# Altium PCB DB_2.PcbDoc (part 1 of 2)
Units mil, origin at the board's own origin, x right, y up, seen from the top; angles counter-clockwise.
Board outline 1675 x 1950 mil, 4 copper layers (Top Layer, Signal Layer 1, Ground, Bottom Layer), stack 30.634 mil thick; 76 components, 70 nets, 293 pads, 58 vias.
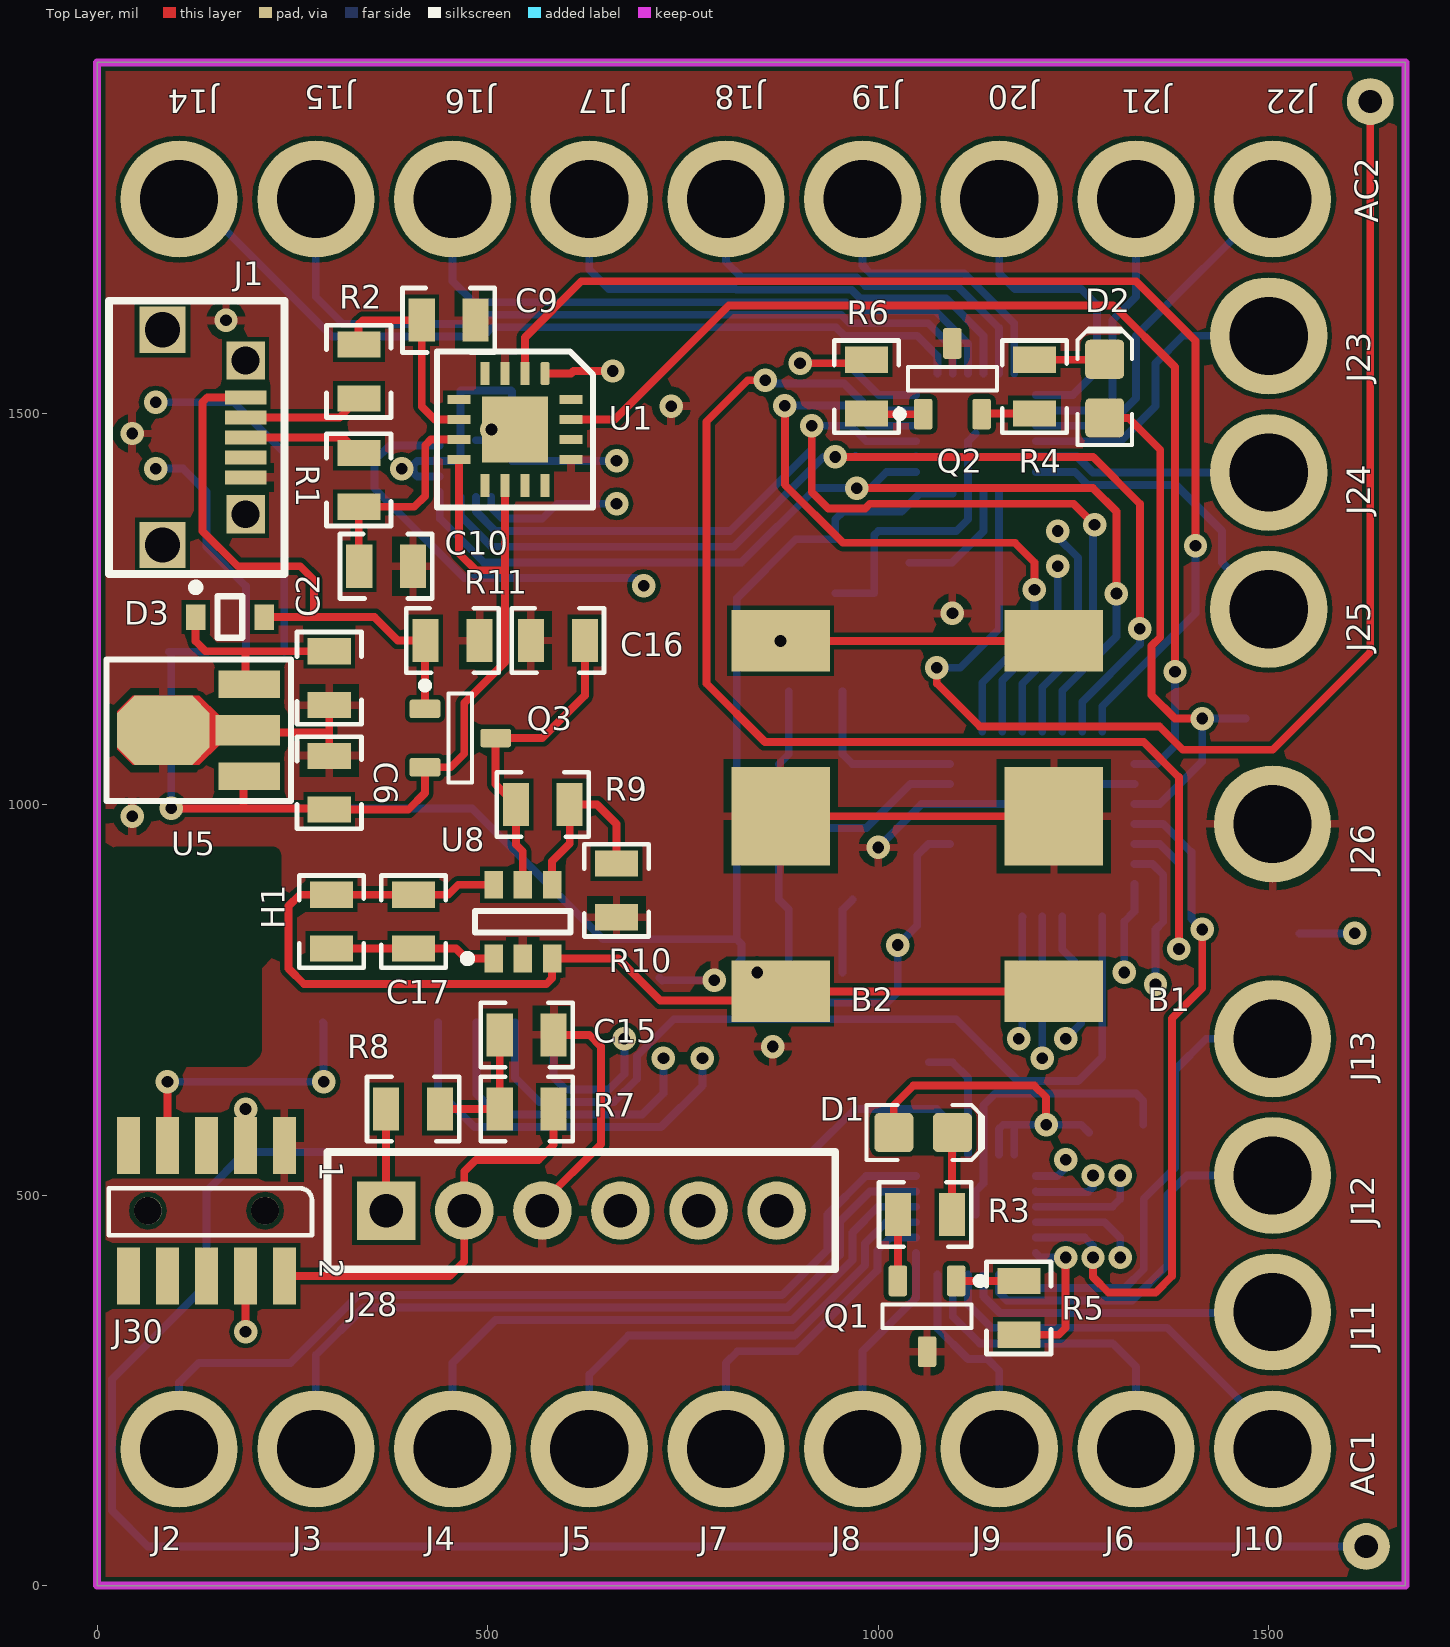
[diagram p0: Top Layer view]
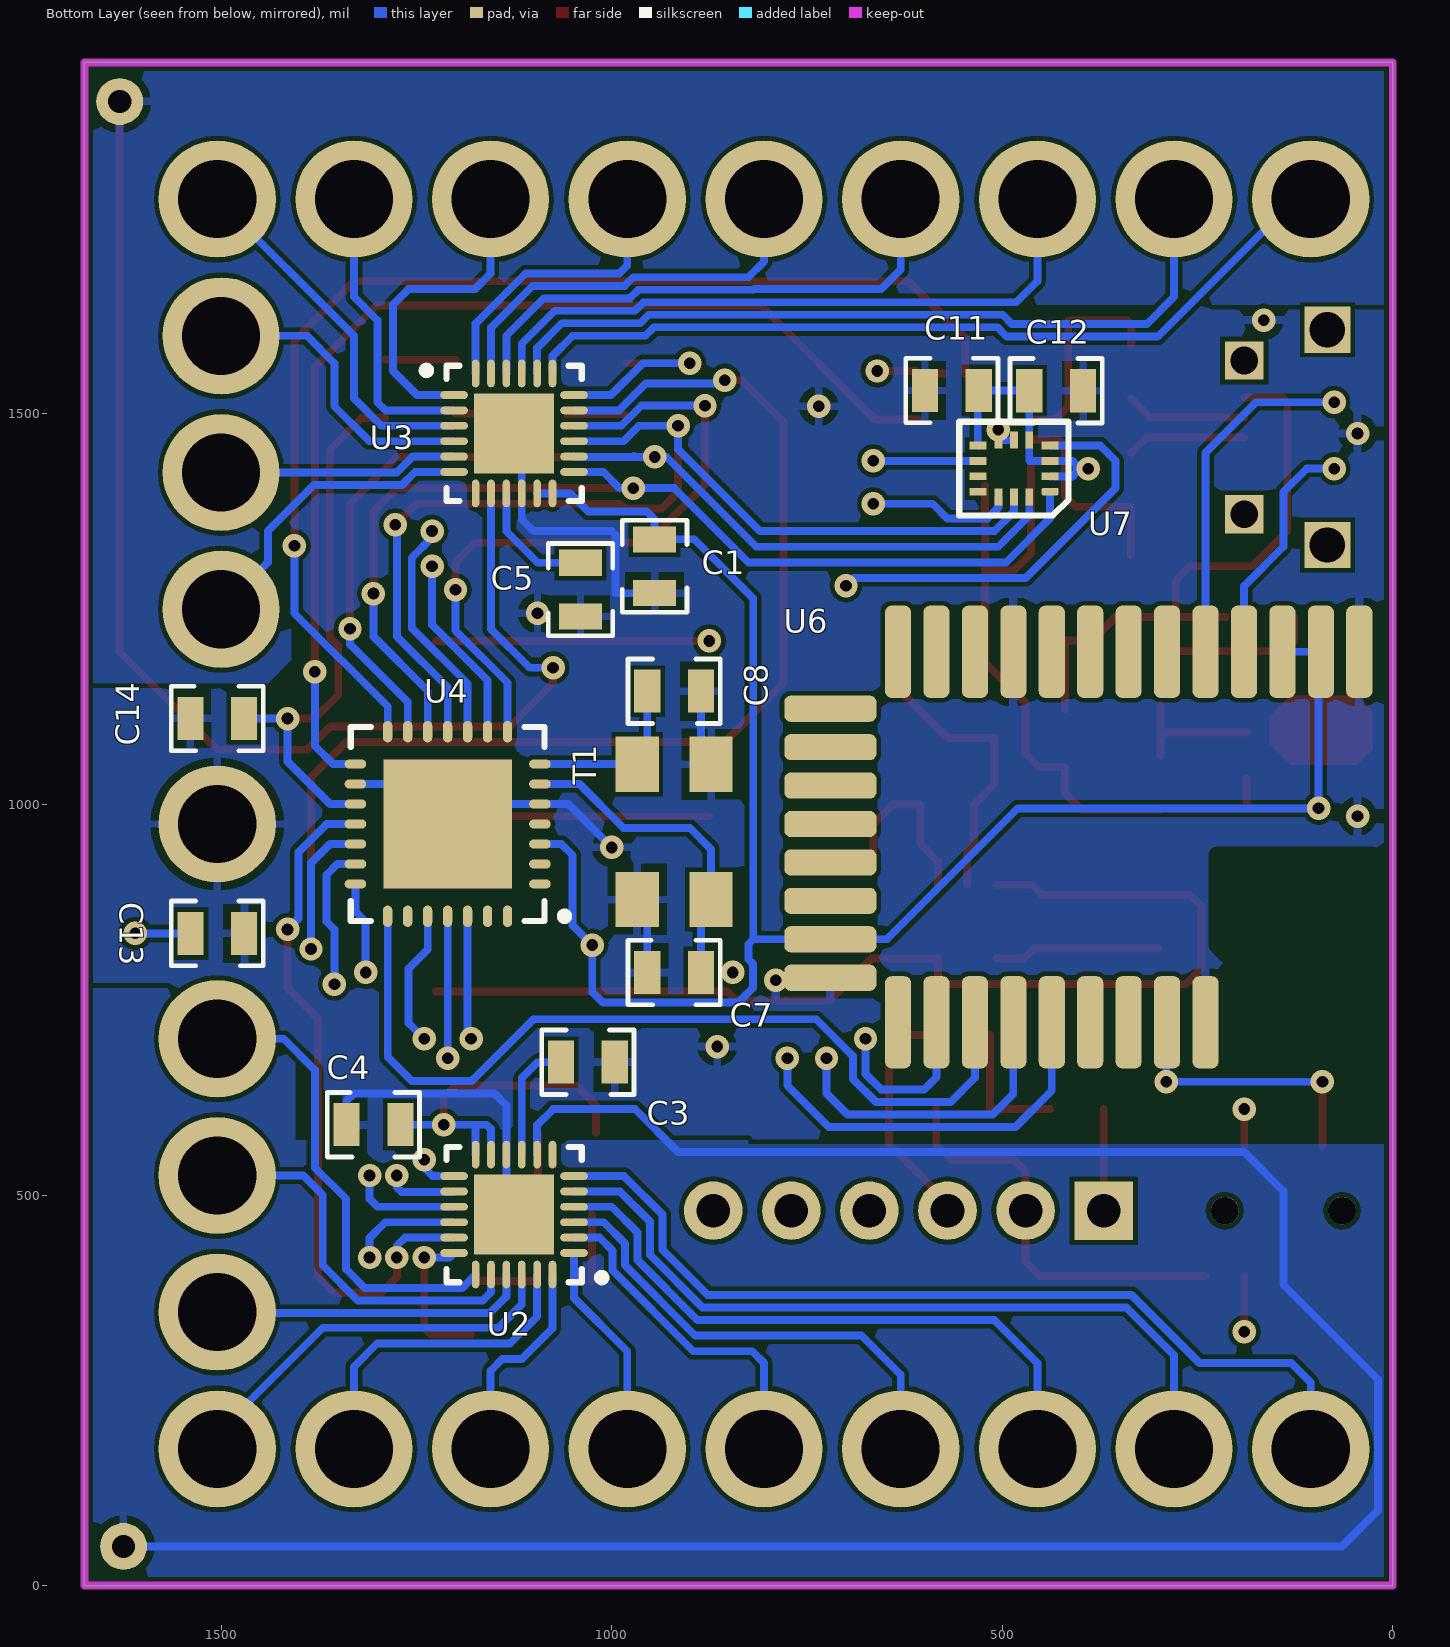
[diagram p1: Bottom Layer view, seen from below]
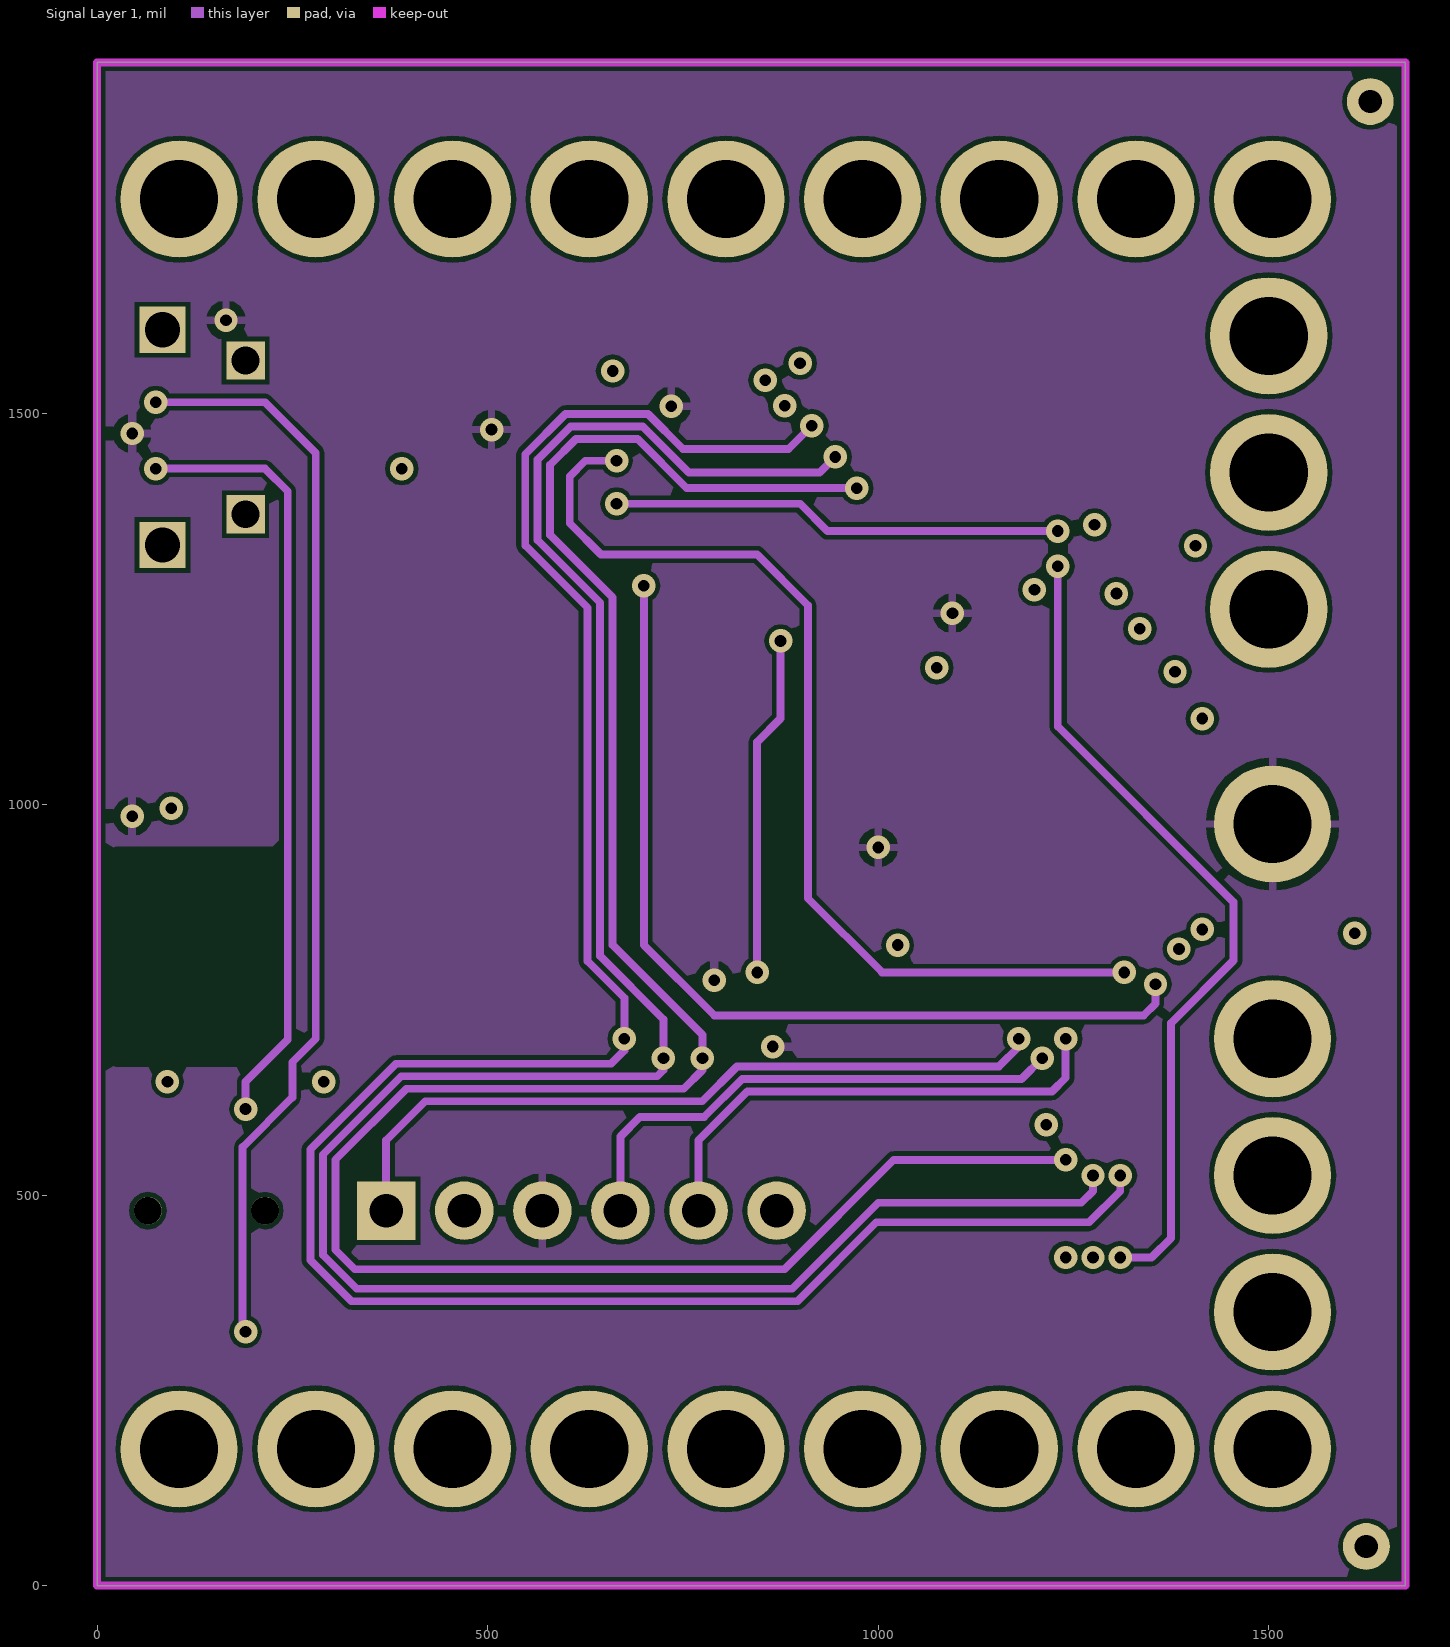
[diagram p2: Signal Layer 1]
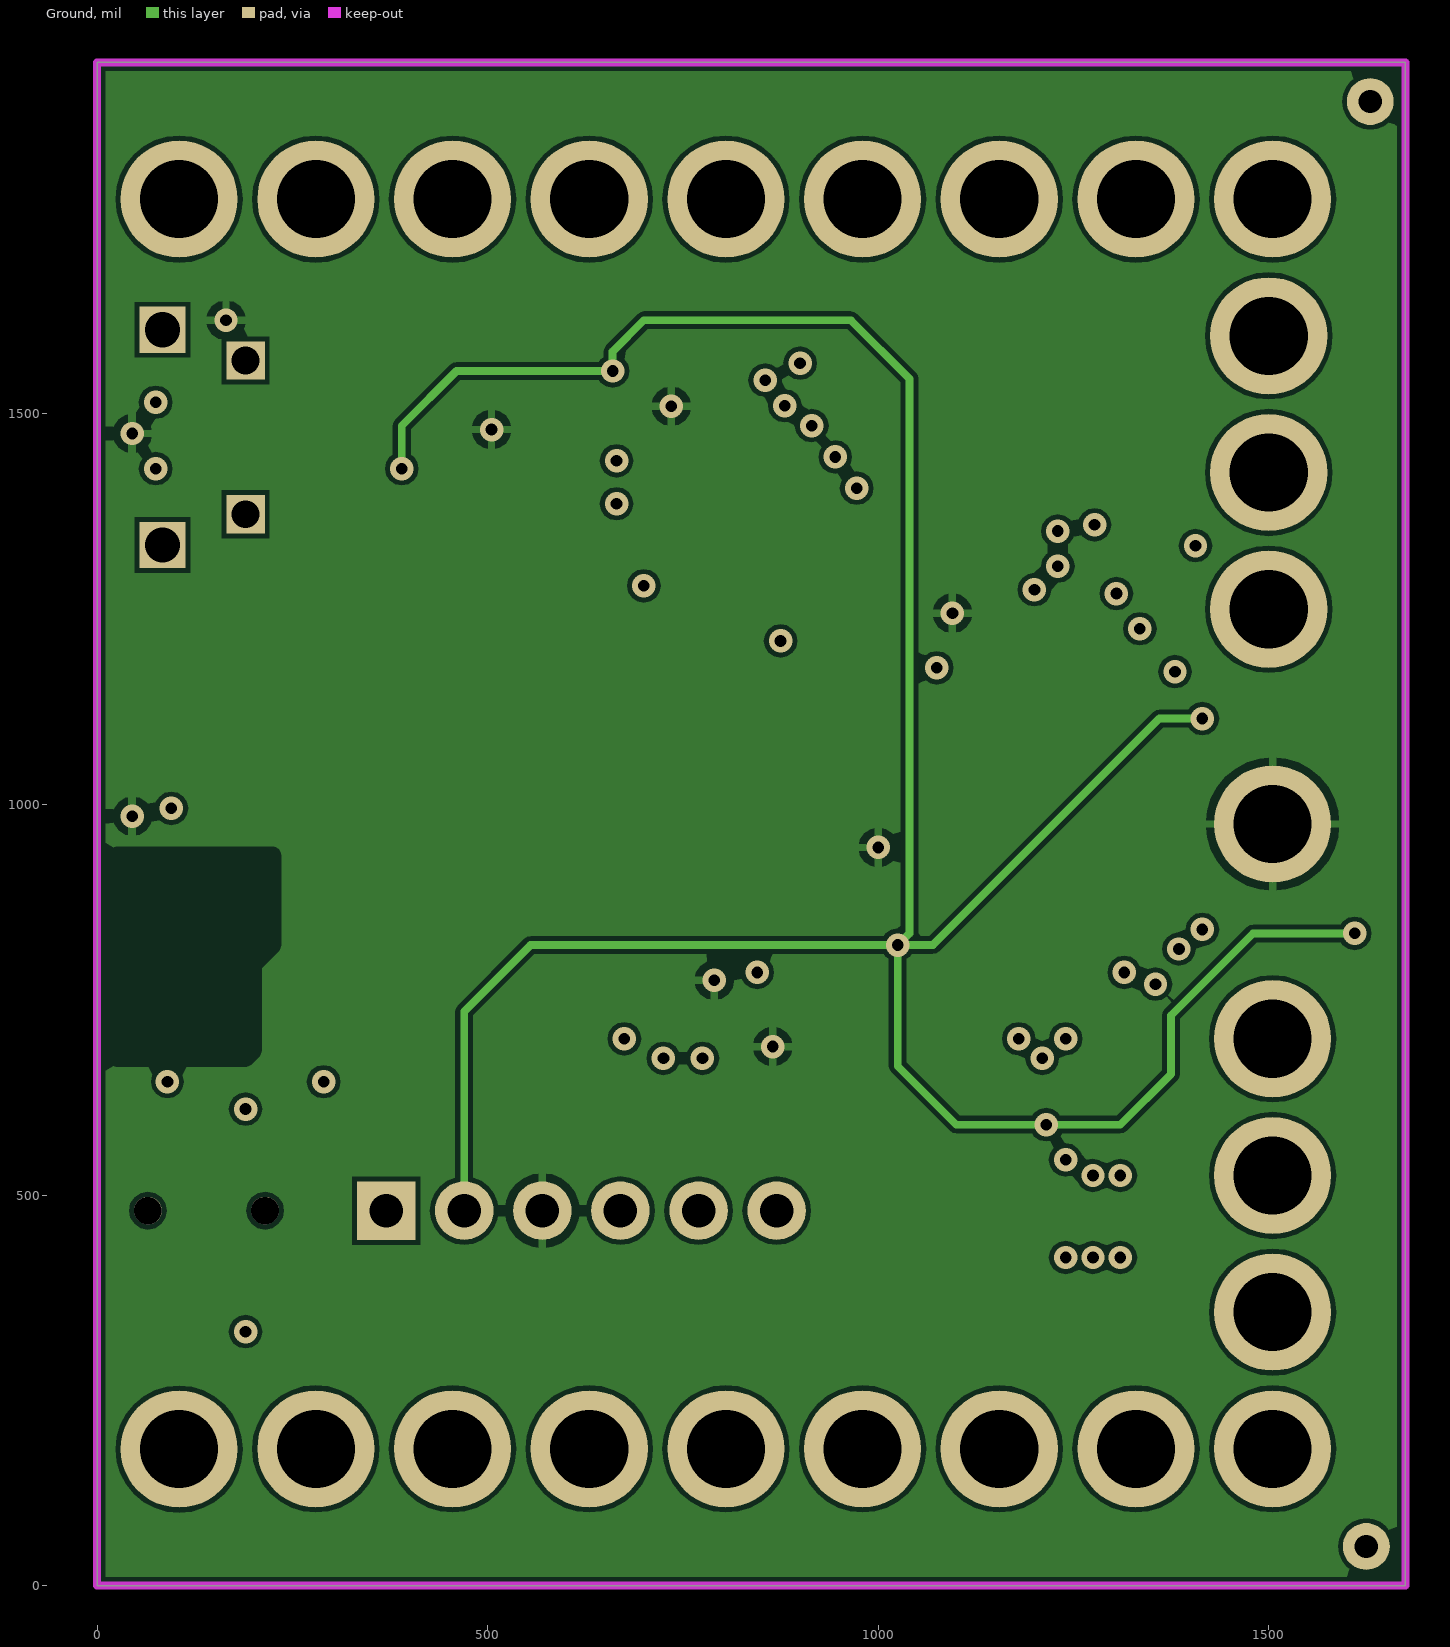
[diagram p3: Ground]
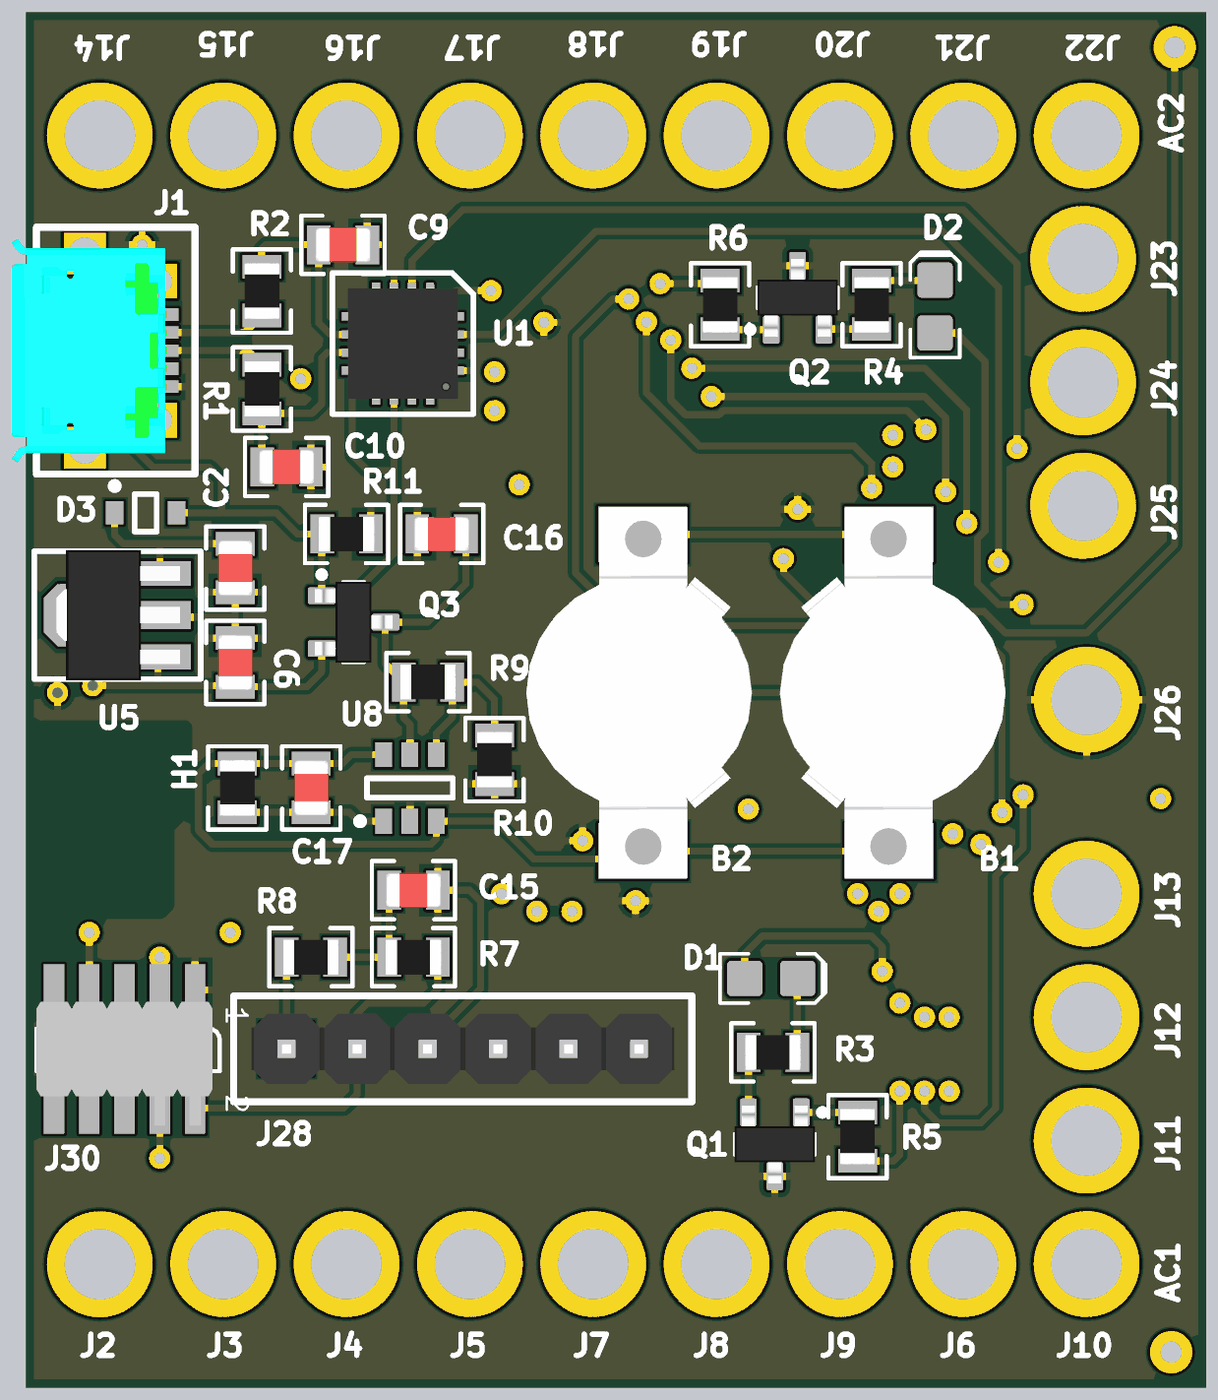
[diagram p4: 3D render of the assembled board from above, using the file's embedded part models]
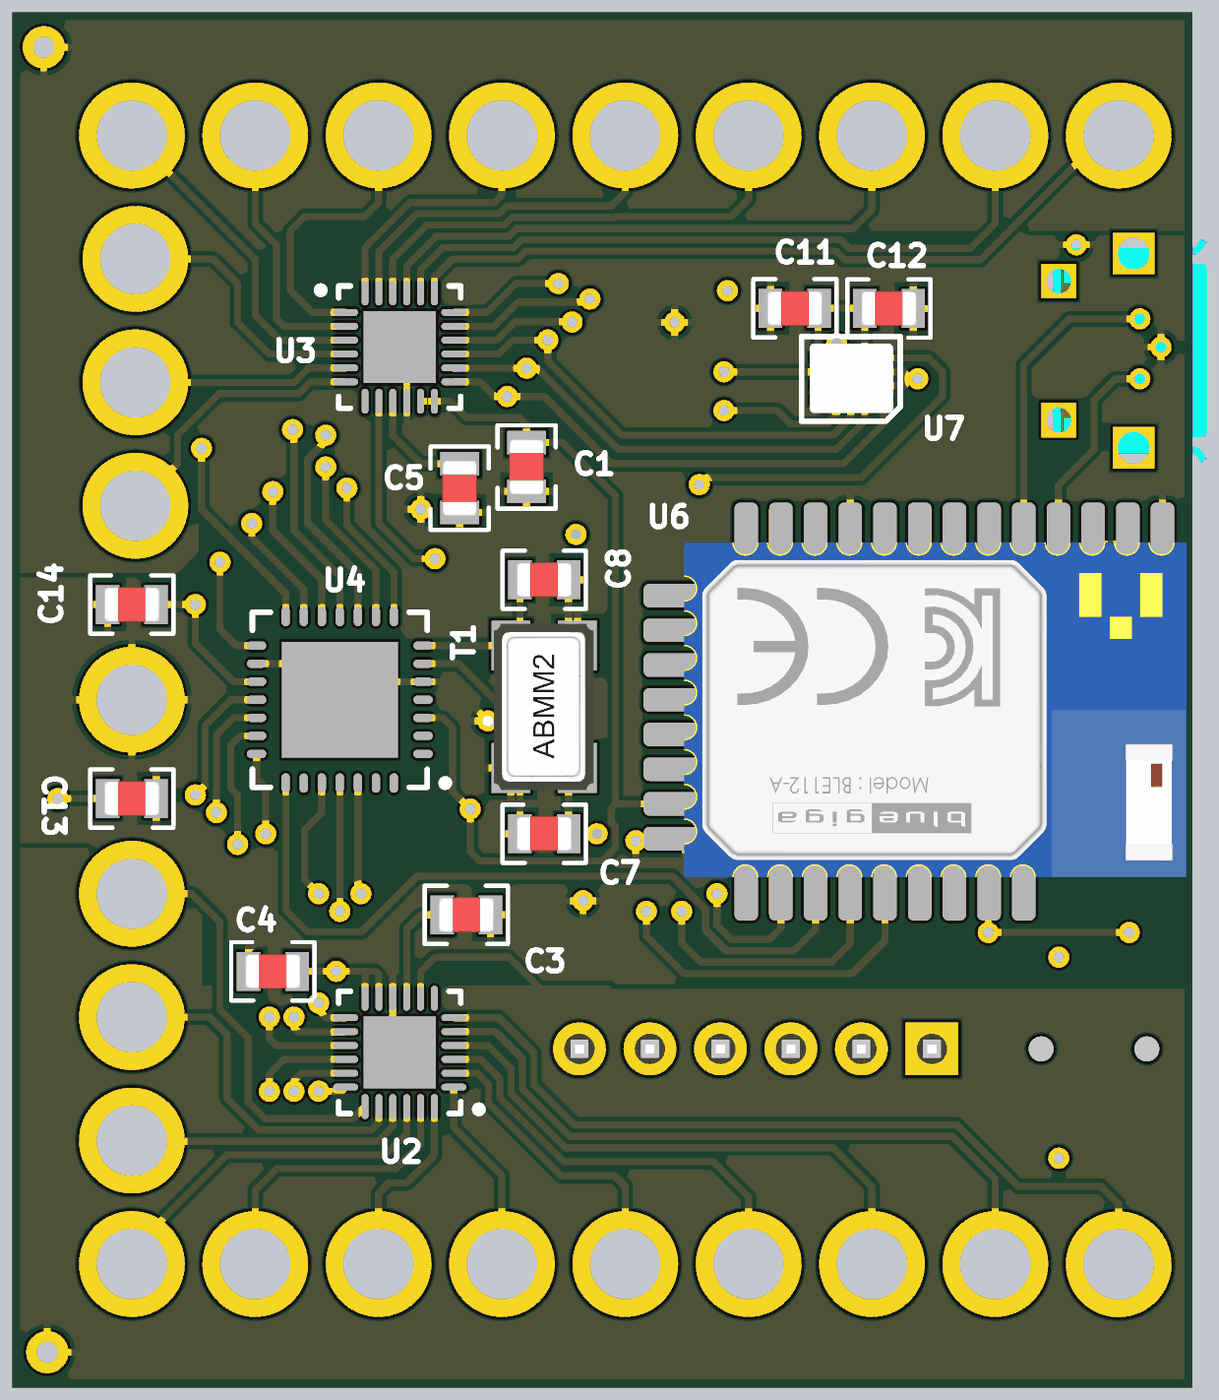
[diagram p5: 3D render of the assembled board from below, using the file's embedded part models]

## Layer stack, top to bottom
Top Solder: solder mask 0.4, Solder Resist, Dk 3.5
Top Layer: signal copper 1.4
Dielectric 1: core 10, FR-4, Dk 4.2
Signal Layer 1: signal copper 1.417
Dielectric 3: prepreg 5, Dk 4.2
Ground: signal copper 1.417
Dielectric 2: core 10, Dk 4.2
Bottom Layer: signal copper 1.4
Bottom Solder: solder mask 0.4, Solder Resist, Dk 3.5

## Board outline
0,0 1675,0 1675,1950 0,1950

## Design rules (kind name [scope] priority, off if disabled: settings)
Clearance [All] p1: gap=6 ignorepadtopadclearanceinfootprint=FALSE except(0: Arc-Hole Track-Hole SMDPad-Hole THPad-Hole Via-Hole Fill-Hole Poly-Hole Region-Hole Text-Hole)
HoleSize [All] p1: absolutevalues=TRUE maxlimit=200 minlimit=1 maxpercent=80.000 minpercent=20.000
HoleToHoleClearance [All] p1: gap=6 allowstackedmicrovias=TRUE
MinimumSolderMaskSliver [All] p1: minsoldermaskwidth=6
PolygonConnect [All] p1: connectstyle=Relief reliefconductorwidth=10 reliefentries=4 polygonreliefangle="90 Angle" airgapwidth=10
RoutingVias [All] p1: holewidth=28 width=50 viastyle="Through Hole" minholewidth=3 minwidth=8 maxholewidth=28 maxwidth=50
SilkToSilkClearance [All] p1: silktosilkclearance=6
SilkToSolderMaskClearance [IsPad] p1: minsilkscreentomaskgap=6 clearancetoexposedcopper=TRUE
SolderMaskExpansion [All] p1: expansion=4
Width [All] p1: maxlimit=50 minlimit=6 preferedwidth=10
25 further rules are at their usual default settings.

## Classes and differential pairs
component class Battery: B1 B2 C2 C6 C9 C10 C16 C17 D3 H1 J1 Q3 R1 R2 R9 R10 R11 U5 U8
component class Sheet-2: AC1 AC2 C1 C3 C4 C5 C7 C8 C11 C12 C13 C14 C15 D1 D2 J2 J3 J4 J5 J6 J7 J8 J9 J10 J11 J12 J13 J14 J15 J16 J17 J18 J19 J20 J21 J22 J23 J24 J25 J26 J28 J30 Q1 Q2 R3 R4 R5 R6 R7 R8 T1 U1 U2 U3 U4 U6 U7

## Components (designator, comment, footprint, x,y, rotation, side; value= is the part's Value field where it differs from the comment)
AC1 "AC_Shield" AC_SHIELD 1625,50 r0 top
AC2 "AC_Shield" AC_SHIELD 1630,1900 r90 top
B1 "XR48" XR48 1225,985 r270 top
B2 "XR48" XR48 875,985 r90 top
C1 "0.1µF" CAP-0805(2012)-R 945,1305 r270 bottom
C2 "0.33µF" CAP-0805(2012)-R 297.17,1161.73 r270 top
C3 "10000pF" CAP-0805(2012)-R 1030.55,670 r180 bottom
C4 "0.1µF" CAP-0805(2012)-R 1305,590 r0 bottom
C5 "10000pF" CAP-0805(2012)-R 1040,1275 r270 bottom
C6 "0.1µF" CAP-0805(2012)-R 297.17,1027.83 r90 top
C7 "18pF" CAP-0805(2012)-R 920,785 r0 bottom
C8 "18pF" CAP-0805(2012)-R 920,1145 r180 bottom
C9 "47pF" CAP-0805(2012)-R 450,1620 r180 top
C10 "47pF" CAP-0805(2012)-R 370,1305 r180 top
C11 "0.1µF" CAP-0805(2012)-R 564.45,1530 r180 bottom
C12 "10000pF" CAP-0805(2012)-R 430.87,1529.68 r0 bottom
C13 "0.1µF" CAP-0805(2012)-R 1505,835 r180 bottom
C14 "0.1µF" CAP-0805(2012)-R 1505,1110 r0 bottom
C15 "0.1uF" CAP-0805(2012)-R 550,705 r0 top
C16 "10uF" CAP-0805(2012)-R 590,1210 r180 top
C17 "4.7uF" CAP-0805(2012)-R 405,850 r270 top
D1 "YELLOW" LED-0805-A 1057.5,580 r0 top
D2 "YELLOW" LED-0805-A 1290,1532.5 r90 top
D3 "Shottky_Diode" SOD-323-2 170,1240 r0 top
H1 "H-0805(2012)" H-0805(2012)-H 300,850 r90 top
J1 "USB" USB_CONNECTOR_5P_MICRO_USB_FCI 190,1470 r270 top
J2 "Conductive Thread" THREAD_HOLE 105,174.61 r180 top
J3 "Conductive Thread" THREAD_HOLE 280,175 r180 top
J4 "Conductive Thread" THREAD_HOLE 455,175 r180 top
J5 "Conductive Thread" THREAD_HOLE 630,175 r180 top
J6 "Conductive Thread" THREAD_HOLE 1330,175 r180 top
J7 "Conductive Thread" THREAD_HOLE 805,175 r180 top
J8 "Conductive Thread" THREAD_HOLE 980,175 r180 top
J9 "Conductive Thread" THREAD_HOLE 1155,175 r180 top
J10 "Conductive Thread" THREAD_HOLE 1505,175 r180 top
J11 "Conductive Thread" THREAD_HOLE 1505,350 r180 top
J12 "Conductive Thread" THREAD_HOLE 1505,525 r180 top
J13 "Conductive Thread" THREAD_HOLE 1505,700 r270 top
J14 "Conductive Thread" THREAD_HOLE 105,1775 r0 top
J15 "Conductive Thread" THREAD_HOLE 280,1775 r180 top
J16 "Conductive Thread" THREAD_HOLE 455,1775 r0 top
J17 "Conductive Thread" THREAD_HOLE 630,1775 r180 top
J18 "Conductive Thread" THREAD_HOLE 805,1775 r180 top
J19 "Conductive Thread" THREAD_HOLE 980,1775 r180 top
J20 "Conductive Thread" THREAD_HOLE 1155,1775 r180 top
J21 "Conductive Thread" THREAD_HOLE 1330,1775 r180 top
J22 "Conductive Thread" THREAD_HOLE 1505,1775 r180 top
J23 "Conductive Thread" THREAD_HOLE 1500,1600 r90 top
J24 "Conductive Thread" THREAD_HOLE 1500,1425 r90 top
J25 "Conductive Thread" THREAD_HOLE 1500,1250 r90 top
J26 "Conductive Thread" THREAD_HOLE 1505,975 r180 top
J28 "Header 6 pin" HEADER-6-100MIL 370,480 r0 top
J30 "GRPB052VWQP-RC" GRPB052VWQP-RC 40,563.5 r270 top
Q1 "Value" SOT23-3 1062.6,344.72 r90 top
Q2 "Value" SOT23-3 1095,1545 r270 top
Q3 "DMP1045U" SOT23-3 465,1085 r180 top
R1 "27" R-0805(2012)-R 335,1415.55 r270 top
R2 "27" R-0805(2012)-R 335,1554.45 r90 top
R3 "30" R-0805(2012)-R 1060,475 r0 top
R4 "30" R-0805(2012)-R 1200,1535 r90 top
R5 "1k" R-0805(2012)-R 1180,355.55 r270 top
R6 "1k" R-0805(2012)-R 985,1535 r270 top
R7 "10k" R-0805(2012)-R 550,610 r0 top
R8 "330" R-0805(2012)-R 404.45,610 r0 top
R9 "976KR" R-0805(2012)-R 570.55,1000 r0 top
R10 "562KR" R-0805(2012)-R 665,890 r270 top
R11 "10KR" R-0805(2012)-R 455,1210 r180 top
T1 "8MHz" CRYSTAL-8MHZ 920,965 r90 bottom
U1 "FT230XQ-R" QFN-16 535,1480 r270 top
U2 "ADI-AD7147" LFCSP_WQ 1125,475 r0 bottom
U3 "ADI-AD7147" LFCSP_WQ 1125,1475 r180 bottom
U4 "PIC18F25K80" MCHP-QFN-S-MM28_N 1210,975 r0 bottom
U5 "L78L33ACUTR" SOT89-3 130,1095 r180 top
U6 "BLE112-A-V1" BLE112-A-V1 720,1195.47 r270 bottom
U7 "LSM6DS3H" LGA-14 485,1430 r0 bottom
U8 "MCP1640BT-I/CHY" MCHP-SOT-23-CHY6_L 545,850 r90 top

## Footprints (in the part's own frame and the unit in brackets; to place one, negate y for a bottom-side part, rotate by r counter-clockwise, add the part's x,y. Pads: shape width x height; smd on the part's side, far side on the other; paste and mask are expansions set on the pad)
AC_SHIELD [mil]
  round 60 hole 30: 1(0,0)
BLE112-A-V1 [mm] "CLASS 2 BLTOOTH 4.0 MODULE"
  rrect50% 3x0.85 smd: 1(0,17.2) 2(0,15.95) 3(0,14.7) 4(0,13.45) 5(0,12.2) 6(0,10.95) 7(0,9.7) 8(0,8.45) 9(0,7.2) 10(0,5.95) 11(0,4.7) 12(0,3.45) 13(0,2.2) 22(12.05,2.2) 23(12.05,3.45) 24(12.05,4.7) 25(12.05,5.95) 26(12.05,7.2) 27(12.05,8.45) 28(12.05,9.7) 29(12.05,10.95) 30(12.05,12.2)
  rrect50% 0.85x3 smd: 14(1.85,0) 15(3.1,0) 16(4.35,0) 17(5.6,0) 18(6.85,0) 19(8.1,0) 20(9.35,0) 21(10.6,0)
  body extent -0.06,-0.03 11.99,18.07, height 2.3
CAP-0805(2012)-R [mm] "Capacitor 0805(2012) Reflow"
  rect 0.85x1.4 smd: 1(-0.875,0) 2(0.875,0)
  silkscreen extent -1.5,-1.05 1.5,1.05, body extent -1,-0.63 1,0.63, height 0.78
CRYSTAL-8MHZ [mm] "ABRACON ABMM2-8.000MHZ-E2-T"
  rect 1.8x1.4 smd: 1(-2.2,-1.2) 2(-2.2,1.2) 2(2.2,-1.2) 3(2.2,1.2)
  body extent -3,-1.78 3,1.82, height 1.21
GRPB052VWQP-RC [mm] "CONN HEADER .050\" 10PS DL SMD AU"
  rect 1.85x0.74 smd: 1(0,5.08) 2(4.25,5.08) 3(0,3.81) 4(4.25,3.81) 5(0,2.54) 6(4.25,2.54) 7(0,1.27) 8(4.25,1.27) 9(0,0) 10(4.25,0)
  round 0.9 hole 0.9 unplated: 21(2.121,0.635) 22(2.121,4.445)
  silkscreen extent 1.4,-0.63 2.92,5.97, body extent -0.62,-0.63 4.88,5.72, height 4.1
H-0805(2012)-H [mm] "Inductor 0805(2012) Reflow"
  rect 0.85x1.4 smd: 1(-0.875,0) 2(0.875,0)
  silkscreen extent -1.5,-1.05 1.5,1.05, body extent -1,-0.62 1,0.63, height 0.5
HEADER-6-100MIL [mil] "100 mil spacing"
  rect 75x75 hole 43: 1(0,0)
  round 75 hole 43: 2(100,0) 3(200,0) 4(300,0) 5(400,0) 6(500,0)
  silkscreen extent -75,-75 575,75, body extent -50,-50 550,50, height 339
LED-0805-A [mil]
  round 20 on Mech14: 0(0,0)
  rrect25% 50x50 smd: A(-37.5,0) K(37.5,0)
  Top Layer pour cut-out: -15,30 15,30 15,-30 -15,-30
  silkscreen extent -72,-35 77,35, body extent -39,-25 39,25, height 31
LFCSP_WQ [mm] "QFN, 24-Leads, Body 4x4mm, Pitch 0.5mm, Thermal Pad 2.5x2.5mm, IPC Medium Density"
  oval 0.9x0.25 smd: 1(-1.95,1.25) 2(-1.95,0.75) 3(-1.95,0.25) 4(-1.95,-0.25) 5(-1.95,-0.75) 6(-1.95,-1.25) 13(1.95,-1.25) 14(1.95,-0.75) 15(1.95,-0.25) 16(1.95,0.25) 17(1.95,0.75) 18(1.95,1.25)
  oval 0.25x0.9 smd: 7(-1.25,-1.95) 8(-0.75,-1.95) 9(-0.25,-1.95) 10(0.25,-1.95) 11(0.75,-1.95) 12(1.25,-1.95) 19(1.25,1.95) 20(0.75,1.95) 21(0.25,1.95) 22(-0.25,1.95) 23(-0.75,1.95) 24(-1.25,1.95)
  rect 2.6x2.6 smd: 25(0,0)
  silkscreen extent -2.97,-2.2 2.2,2.2, body extent -2.05,-2.05 2.05,2.05, height 1
LGA-14 [mm] "LGA-14 2.5X3X0.86 14L"
  rrect50% 0.55x0.25 smd: 1(-1.175,0.75)
  rect 0.55x0.25 smd: 2(-1.175,0.25) 3(-1.175,-0.25) 4(-1.175,-0.75) 8(1.175,-0.75) 9(1.175,-0.25) 10(1.175,0.25) 11(1.175,0.75)
  rect 0.25x0.55 smd: 5(-0.5,-0.925) 6(0,-0.925) 7(0.5,-0.925) 12(0.5,0.925) 13(0,0.925) 14(-0.5,0.925)
  silkscreen extent -1.78,-1.52 1.78,1.52, body extent -1.52,-1.27 1.48,1.23, height 0.86
MCHP-QFN-S-MM28_N [mm] "QFN, 28-Leads, Body 6x6mm, Pitch 0.65mm, Thermal Pad 4.175x4.175mm, IPC Medium Density"
  oval 0.7x0.3 smd: 1(-3,1.95) 2(-3,1.3) 3(-3,0.65) 4(-3,0) 5(-3,-0.65) 6(-3,-1.3) 7(-3,-1.95) 15(3,-1.95) 16(3,-1.3) 17(3,-0.65) 18(3,0) 19(3,0.65) 20(3,1.3) 21(3,1.95)
  oval 0.3x0.7 smd: 8(-1.95,-3) 9(-1.3,-3) 10(-0.65,-3) 11(0,-3) 12(0.65,-3) 13(1.3,-3) 14(1.95,-3) 22(1.95,3) 23(1.3,3) 24(0.65,3) 25(0,3) 26(-0.65,3) 27(-1.3,3) 28(-1.95,3)
  rect 4.18x4.18 smd: 29(0,0)
  silkscreen extent -3.92,-3.15 3.15,3.15, body extent -3,-3 3,3, height 1
MCHP-SOT-23-CHY6_L [mm] "SOT23, 6-Leads, Body 2.9x1.55mm, Pitch 0.95mm, IPC High Density"
  rect 0.9x0.6 smd: 1(-1.2,0.95) 2(-1.2,0) 3(-1.2,-0.95) 4(1.2,-0.95) 5(1.2,0) 6(1.2,0.95)
  silkscreen extent -1.32,-1.55 0.35,1.92, body extent -0.9,-1.55 0.9,1.55, height 1.45
QFN-16 [mm]
  rrect50% 0.75x0.3 smd: 1(-1.825,0.975)
  rect 0.75x0.3 smd: 2(-1.825,0.325) 3(-1.825,-0.325) 4(-1.825,-0.975) 9(1.825,-0.975) 10(1.825,-0.325) 11(1.825,0.325) 12(1.825,0.975)
  rect 0.3x0.75 smd: 5(-0.975,-1.825) 6(-0.325,-1.825) 7(0.325,-1.825) 8(0.975,-1.825) 13(0.975,1.825) 14(0.325,1.825) 15(-0.325,1.825) 16(-0.975,1.825)
  rect 2.15x2.15 smd: 17(0,0)
  silkscreen extent -2.54,-2.54 2.54,2.54, body extent -2,-2 2,2, height 0.92
R-0805(2012)-R [mm] "Resistor 0805(2012) Reflow"
  rect 0.85x1.4 smd: 1(-0.875,0) 2(0.875,0)
  silkscreen extent -1.5,-1.05 1.5,1.05, body extent -1,-0.62 1,0.63, height 0.5
SOD-323-2 [mm] "SOD, 2-Leads, Body 1.7x1.25mm"
  rect 0.63x0.83 smd: 1(-1.115,0) 2(1.115,0)
  silkscreen extent -1.24,-0.67 0.4,1.09, body extent -0.85,-0.63 0.85,0.63, height 1.06
SOT23-3 [mm] "SOT23, 3 pin"
  round 0.5 on Mech14: 0(0,0)
  rrect25% 1x0.6 smd: 1(1.15,-0.95) 2(-1.15,0) 3(1.15,0.95)
  silkscreen extent -0.38,-1.81 1.25,1.45, body extent -1.4,-1.45 1.4,1.45, height 1.29
SOT89-3 [mm] "JEDEC TO-243 option AA / SOT89"
  round 1 on Mech14: 0(0,0)
  rrect1% 2x0.9 smd: 1(-1.65,1.5) 3(-1.65,-1.5)
  rrect1% 2.1x1 smd: 2(-1.6,0)
  oct 3x2.25 smd: 2(1.15,0)
  Top Layer region: -0.7,-0.45 -0.025,-1.125 2.15,-1.125 2.65,-0.625 2.65,0.625 2.15,1.125 -0.025,1.125 -0.7,0.45
  silkscreen extent -3,-2.3 3,2.3, body extent -2.25,-2.35 2.2,2.35, height 1.69
THREAD_HOLE [mil] "MAGNETIC_THREAD_HOLE"
  round 150 hole 100: 1(0,0)
USB_CONNECTOR_5P_MICRO_USB_FCI [mm] "USB_Connector_5P_MICRO_USB_FCI_TypeB"
  rect 0.45x1.35 smd: 1(-1.3,0) 2(-0.65,0) 3(0,0) 4(0.65,0) 5(1.3,0)
  rect 1.25x1.25 hole 0.9: 15(2.5,0) 16(-2.5,0)
  rect 1.5x1.5 hole 1.15: 18(-3.5,-2.7) 18(3.5,-2.7)
  silkscreen extent -4.44,-4.45 4.45,1.27, body extent -4.02,-5.33 4.02,0.25, height 2.73
XR48 [mm] "Size 13 Coin Cell Battery"
  rect 3.2x3.2 smd: 1(0,0)
  rect 2x3.2 smd: 2(-5.7,0) 2(5.7,0)
  body extent -6.68,-3.95 6.68,4.19, height 5.75

## Part data
C1 C4 C6 C11 C13 C14: library part C-0805(2012), "___ OHM ___ mW 0805(2012) SMD", Manufacturer=Yageo, Manufacturer Part Number=CC0805KRX7R9BB104, Operating Temperature="-55°C ~ 125°C", Package / Case="0805 (2012 Metric)", Ratings=-, Supplier Part Number 1=311-1140-1-ND, Temperature Coefficient=X7R, Tolerance=±10%, Voltage - Rated=50V, Applications="General Purpose", Capacitance=0.1µF, Category=Capacitors, Failure Rate=-, Features=-, Height - Seated (Max)=-, Lead Spacing=-, Lead Style=-, Mounting Type="Surface Mount, MLCC", Packaging="Cut Tape (CT)", Part Status=Active, RoHS="RoHS Compliant", Size / Dimension="0.079\" L x 0.049\" W (2.00mm x 1.25mm)", Supplier 1=Digi-Key, Thickness (Max)="0.033\" (0.85mm)"
  C1 C4 C13 C14: ComponentLink1Description=http://www.yageo.com/documents/recent/UPY-GPHC_X7R_6.3V-to-50V_16.pdf, ComponentLink1URL=http://www.yageo.com/documents/recent/UPY-GPHC_X7R_6.3V-to-50V_16.pdf, Pricing 1="1=0.1, 10=0.052, 25=0.0376, 50=0.0282, 100=0.023, 250=0.01928, 500=0.01646, 1000=0.01294 (USD)", Stock 1=1673347
  C6: ComponentLink1Description=http://www.yageo.com/documents/recent/UPY-GPHC_X7R_6.3V-to-50V_16.pdf, ComponentLink1URL=http://www.yageo.com/documents/recent/UPY-GPHC_X7R_6.3V-to-50V_16.pdf, Pricing 1="1=0.1, 10=0.052, 25=0.0376, 50=0.0282, 100=0.023, 250=0.01928, 500=0.01646, 1000=0.01294 (USD)", Stock 1=1673292
  C11: ComponentLink1Description=http://www.yageo.com/documents/recent/UPY-GPHC_X7R_6.3V-to-50V_17.pdf, ComponentLink1URL=http://www.yageo.com/documents/recent/UPY-GPHC_X7R_6.3V-to-50V_17.pdf, Pricing 1="1=0.1, 10=0.053, 25=0.0388, 50=0.029, 100=0.0237, 250=0.0198, 500=0.0169, 1000=0.01328 (USD)", Stock 1=1402266
C2: library part C-0805(2012), "___ OHM ___ mW 0805(2012) SMD", Manufacturer=Yageo, Manufacturer Part Number=CC0805KKX7R7BB334, Operating Temperature="-55°C ~ 125°C", Package / Case="0805 (2012 Metric)", Ratings=-, Supplier Part Number 1=311-1882-1-ND, Temperature Coefficient=X7R, Tolerance=±10%, Voltage - Rated=16V, Applications="General Purpose", Capacitance=0.33µF, Category=Capacitors, ComponentLink1Description=http://www.yageo.com/documents/recent/UPY-GPHC_X7R_6.3V-to-50V_16.pdf, ComponentLink1URL=http://www.yageo.com/documents/recent/UPY-GPHC_X7R_6.3V-to-50V_16.pdf, Failure Rate=-, Features=-, Height - Seated (Max)=-, Lead Spacing=-, Lead Style=-, Mounting Type="Surface Mount, MLCC", Packaging="Cut Tape (CT)", Part Status=Active, Pricing 1="1=0.19, 10=0.129, 25=0.0948, 50=0.0776, 100=0.0655, 250=0.05344, 500=0.04482, 1000=0.03965 (USD)", RoHS="RoHS Compliant", Size / Dimension="0.079\" L x 0.049\" W (2.00mm x 1.25mm)", Stock 1=5738, Supplier 1=Digi-Key, Thickness (Max)="0.057\" (1.45mm)"
C3 C5 C12: library part C-0805(2012), "___ OHM ___ mW 0805(2012) SMD", Manufacturer=Yageo, Manufacturer Part Number=CC0805KRX7R9BB103, Operating Temperature="-55°C ~ 125°C", Package / Case="0805 (2012 Metric)", Ratings=-, Supplier Part Number 1=311-1136-1-ND, Temperature Coefficient=X7R, Tolerance=±10%, Voltage - Rated=50V, Applications="General Purpose", Capacitance=10000pF, Category=Capacitors, Failure Rate=-, Features=-, Height - Seated (Max)=-, Lead Spacing=-, Lead Style=-, Mounting Type="Surface Mount, MLCC", Packaging="Cut Tape (CT)", Part Status=Active, RoHS="RoHS Compliant", Size / Dimension="0.079\" L x 0.049\" W (2.00mm x 1.25mm)", Supplier 1=Digi-Key, Thickness (Max)="0.024\" (0.60mm)"
  C3 C5: ComponentLink1Description=http://www.yageo.com/documents/recent/UPY-GPHC_X7R_6.3V-to-50V_16.pdf, ComponentLink1URL=http://www.yageo.com/documents/recent/UPY-GPHC_X7R_6.3V-to-50V_16.pdf, Pricing 1="1=0.1, 10=0.032, 25=0.0232, 50=0.0174, 100=0.0141, 250=0.01184, 500=0.0101, 1000=0.00794 (USD)", Stock 1=786089
  C12: ComponentLink1Description=http://www.yageo.com/documents/recent/UPY-GPHC_X7R_6.3V-to-50V_17.pdf, ComponentLink1URL=http://www.yageo.com/documents/recent/UPY-GPHC_X7R_6.3V-to-50V_17.pdf, Pricing 1="1=0.1, 10=0.033, 25=0.0236, 50=0.0178, 100=0.0145, 250=0.01216, 500=0.01036, 1000=0.00814 (USD)", Stock 1=501331
C7 C8: library part C-0805(2012), "___ OHM ___ mW 0805(2012) SMD", Manufacturer=Yageo, Manufacturer Part Number=CC0805JRNPO9BN180, Operating Temperature="-55°C ~ 125°C", Package / Case="0805 (2012 Metric)", Ratings=-, Supplier Part Number 1=311-1102-1-ND, Temperature Coefficient="C0G, NP0", Tolerance=±5%, Voltage - Rated=50V, Applications="General Purpose", Capacitance=18pF, Category=Capacitors, ComponentLink1Description=http://www.yageo.com/NewPortal/yageodocoutput?fileName=/pdf/MLCC/UPY-GP_NP0_16V-to-50V_14.pdf, ComponentLink1URL=http://www.yageo.com/NewPortal/yageodocoutput?fileName=/pdf/MLCC/UPY-GP_NP0_16V-to-50V_14.pdf, Failure Rate=-, Features=-, Height - Seated (Max)=-, Lead Spacing=-, Lead Style=-, Mounting Type="Surface Mount, MLCC", Packaging="Cut Tape (CT)", Part Status=Active, Pricing 1="1=0.1, 10=0.055, 25=0.0396, 50=0.0298, 100=0.0243, 250=0.02032, 500=0.01734, 1000=0.01363 (USD)", RoHS="RoHS Compliant", Size / Dimension="0.079\" L x 0.049\" W (2.00mm x 1.25mm)", Stock 1=101710, Supplier 1=Digi-Key, Thickness (Max)="0.024\" (0.60mm)"
C9 C10: library part C-0805(2012), "___ OHM ___ mW 0805(2012) SMD", Manufacturer=Yageo, Manufacturer Part Number=CC0805JRNPO9BN470, Operating Temperature="-55°C ~ 125°C", Package / Case="0805 (2012 Metric)", Ratings=-, Supplier Part Number 1=311-1107-1-ND, Temperature Coefficient="C0G, NP0", Tolerance=±5%, Voltage - Rated=50V, Applications="General Purpose", Capacitance=47pF, Category=Capacitors, ComponentLink1Description=http://www.yageo.com/NewPortal/yageodocoutput?fileName=/pdf/MLCC/UPY-GP_NP0_16V-to-50V_14.pdf, ComponentLink1URL=http://www.yageo.com/NewPortal/yageodocoutput?fileName=/pdf/MLCC/UPY-GP_NP0_16V-to-50V_14.pdf, Failure Rate=-, Features=-, Height - Seated (Max)=-, Lead Spacing=-, Lead Style=-, Mounting Type="Surface Mount, MLCC", Packaging="Cut Tape (CT)", Part Status=Active, Pricing 1="1=0.1, 10=0.055, 25=0.0396, 50=0.0298, 100=0.0243, 250=0.02032, 500=0.01734, 1000=0.01363 (USD)", RoHS="RoHS Compliant", Size / Dimension="0.079\" L x 0.049\" W (2.00mm x 1.25mm)", Stock 1=181638, Supplier 1=Digi-Key, Thickness (Max)="0.024\" (0.60mm)"
C15: library part C-0805(2012), "___ OHM ___ mW 0805(2012) SMD", Capacitance=0.1uF
C16: library part C-0805(2012), "___ OHM ___ mW 0805(2012) SMD", Case/Package=0805, Case Code (Metric)=2012, Dielectric=X5R, Manufacturer=Murata, Manufacturer Part Number=GRM219R61A106KE44D, Max Operating Temperature=85°C, Min Operating Temperature=-55°C, Package Quantity=1, Supplier Part Number 1=81-GRM219R61A106KE4D, Tolerance=10%, Voltage=10V, Capacitance=10uF, Case Code (Imperial)=0805, ComponentLink1Description=https://datasheet.ciiva.com/172/grm219r61a106ke44-01-172352.pdf, ComponentLink1URL=https://datasheet.ciiva.com/172/grm219r61a106ke44-01-172352.pdf, ComponentLink2Description=https://datasheet.ciiva.com/172/grm219r61a106ke44-01-172353.pdf, ComponentLink2URL=https://datasheet.ciiva.com/172/grm219r61a106ke44-01-172353.pdf, ComponentLink3Description=https://datasheet.ciiva.com/172/grm219r61a106ke44-01-172354.pdf, ComponentLink3URL=https://datasheet.ciiva.com/172/grm219r61a106ke44-01-172354.pdf, ComponentLink4Description=https://datasheet.ciiva.com/5414/product-5414357.pdf, ComponentLink4URL=https://datasheet.ciiva.com/5414/product-5414357.pdf, ComponentLink5Description=https://datasheet.ciiva.com/3777/54grm219r61a106ke4423-3777910.pdf, ComponentLink5URL=https://datasheet.ciiva.com/3777/54grm219r61a106ke4423-3777910.pdf, ComponentLink6Description=https://datasheet.ciiva.com/7719/c02e-7719062.pdf, ComponentLink6URL=https://datasheet.ciiva.com/7719/c02e-7719062.pdf, ComponentLink7Description=https://datasheet.ciiva.com/2989/product-2989663.pdf, ComponentLink7URL=https://datasheet.ciiva.com/2989/product-2989663.pdf, ComponentLink8Description=https://datasheet.ciiva.com/17451/product-17451791.pdf, ComponentLink8URL=https://datasheet.ciiva.com/17451/product-17451791.pdf, Depth=1.25mm, Height=0.85mm, Lead Free="Lead Free", Length=2mm, Material=Ceramic, Mount="Surface Mount", Packaging="Tape and Reel", Pricing 1="1=0.2, 10=0.084, 50=0.084, 100=0.057, 1000=0.043, 10000=0.03 (USD)", Radiation Hardening=No, REACH SVHC="No SVHC", Stock 1=105901, Supplier 1=Mouser, Termination=SMD/SMT, Thickness=0.037inch, Voltage Rating=10V, Voltage Rating (DC)=10V, Width=1.25mm
C17: library part C-0805(2012), "___ OHM ___ mW 0805(2012) SMD", Case/Package=0805, Case Code (Metric)=2012, Dielectric=X5R, Manufacturer=Murata, Manufacturer Part Number=GRM21BR61C475KA88L, Max Operating Temperature=85°C, Min Operating Temperature=-55°C, Package Quantity=1, Supplier Part Number 1=81-GRM21BR61C475KA8L, Tolerance=10%, Voltage=16V, Capacitance=4.7uF, Case Code (Imperial)=0805, ComponentLink1Description=https://datasheet.ciiva.com/2989/product-2989699.pdf, ComponentLink1URL=https://datasheet.ciiva.com/2989/product-2989699.pdf, ComponentLink2Description=https://datasheet.ciiva.com/2989/product-2989700.pdf, ComponentLink2URL=https://datasheet.ciiva.com/2989/product-2989700.pdf, ComponentLink3Description=https://datasheet.ciiva.com/16199/product-16199957.pdf, ComponentLink3URL=https://datasheet.ciiva.com/16199/product-16199957.pdf, ComponentLink4Description=https://datasheet.ciiva.com/16624/product-16624469.pdf, ComponentLink4URL=https://datasheet.ciiva.com/16624/product-16624469.pdf, ComponentLink5Description=https://datasheet.ciiva.com/22706/608985-22706821.pdf, ComponentLink5URL=https://datasheet.ciiva.com/22706/608985-22706821.pdf, ComponentLink6Description=https://datasheet.ciiva.com/3777/grm21br61c475ka8823-3777176.pdf, ComponentLink6URL=https://datasheet.ciiva.com/3777/grm21br61c475ka8823-3777176.pdf, ComponentLink7Description=https://datasheet.ciiva.com/137/product-137674.pdf, ComponentLink7URL=https://datasheet.ciiva.com/137/product-137674.pdf, ComponentLink8Description=https://datasheet.ciiva.com/137/product-137675.pdf, ComponentLink8URL=https://datasheet.ciiva.com/137/product-137675.pdf, ComponentLink9Description=https://datasheet.ciiva.com/137/product-137676.pdf, ComponentLink9URL=https://datasheet.ciiva.com/137/product-137676.pdf, Depth=1.25mm, Height=1.25mm, Lead Free="Lead Free", Length=2mm, Mount="Surface Mount", Packaging="Tape and Reel", Pricing 1="1=0.2, 10=0.076, 50=0.076, 100=0.053, 1000=0.037, 10000=0.027 (USD)", Radiation Hardening=No, REACH SVHC="No SVHC", Stock 1=95997, Supplier 1=Mouser, Termination=SMD/SMT, Thickness=0.053inch, Voltage Rating=16V, Voltage Rating (DC)=16V, Width=1.25mm
D1 D2: library part LED_0805_YELLOW, "LED, 0805 SMD, YELLOW", Color=Yellow, Current - Test=20mA, Lens Color=White, Manufacturer="OSRAM Opto Semiconductors Inc.", Manufacturer Part Number="LY R976-PS-36", Millicandela Rating=162.5mcd, Package / Case="0805 (2012 Metric)", Supplier Device Package=0805, Supplier Part Number 1=475-2560-1-ND, Voltage - Forward (Vf) (Typ)=2V, Category=Optoelectronics, ComponentLink1Description=http://www.osram-os.com/Graphics/XPic9/00078941_0.pdf, ComponentLink1URL=http://www.osram-os.com/Graphics/XPic9/00078941_0.pdf, Features=-, Height (Max)=0.90mm, Lens Style/Size="Rectangle with Flat Top, 1.30mm x 1.25mm", Lens Transparency=Diffused, Mounting Type="Surface Mount", Packaging="Cut Tape (CT)", Part Status=Active, Pricing 1="1=0.26, 10=0.19, 25=0.1396, 100=0.0998, 250=0.06788, 500=0.0599, 1000=0.04692 (USD)", RoHS="RoHS Compliant", Size / Dimension="2.00mm L x 1.25mm W", Stock 1=77170, Supplier 1=Digi-Key, Viewing Angle=160°, Wavelength - Dominant=588nm, Wavelength - Peak=591nm
D3: "BAT60AE6327HTSA1", Average Rectified Current=3A, Forward Voltage=370mV, Manufacturer=Infineon, Max Operating Temperature=85°C, Max Repetitive Reverse Voltage (Vrrm)=10V, Min Operating Temperature=-55°C, Peak Non-Repetitive Surge Current=5A, Supplier Part Number 1=726-BAT60AE6327, ComponentLink1Description=https://datasheet.ciiva.com/8300/infineon-bat60aseries-ds-v01-01-en-8300325.pdf, ComponentLink1URL=https://datasheet.ciiva.com/8300/infineon-bat60aseries-ds-v01-01-en-8300325.pdf, ComponentLink2Description=https://datasheet.ciiva.com/26948/getdatasheetpartid-743048-26948826.pdf, ComponentLink2URL=https://datasheet.ciiva.com/26948/getdatasheetpartid-743048-26948826.pdf, Contact Plating=Tin, Current Rating=3A, Element Configuration=Single, Forward Current=3A, Lead Free="Lead Free", Manufacturer Part Number=BAT60AE6327HTSA1, Mount="Surface Mount", Number of Pins=2, Output Current=3A, Packaging="Tape and Reel", Polarity=Standard, Pricing 1="1=0.42, 10=0.29, 50=0.29, 100=0.133, 1000=0.103, 10000=0.087 (USD)", Radiation Hardening=No, REACH SVHC="No SVHC", Reverse Voltage (DC)=10V, Stock 1=7383, Supplier 1=Mouser, Voltage Rating (DC)=10V
H1: Case/Package=0805, Case Code (Metric)=2012, Current Rating=700mA, DC Resistance (DCR)=260mR, Inductance=4.7uh, Manufacturer=TDK, Manufacturer Part Number=MLP2012S4R7MT0S1, Max Operating Temperature=125°C, Min Operating Temperature=-40°C, Package Quantity=4000, Supplier Part Number 1=810-MLP2012S4R7MT0S1, Test Frequency=2MHz, Tolerance=20%, Case Code (Imperial)=0805, ComponentLink1Description=https://datasheet.ciiva.com/41798/inductor-commercial-power-mlp-en-41798601.pdf, ComponentLink1URL=https://datasheet.ciiva.com/41798/inductor-commercial-power-mlp-en-41798601.pdf, Core Material=Ferrite, Height - Seated (Max)=0.039inch, Length=0.079inch, Packaging="Tape and Reel", Pricing 1="1=0.36, 10=0.254, 50=0.254, 100=0.236, 1000=0.167, 10000=0.112 (USD)", Shielding=Shielded, Stock 1=5251, Supplier 1=Mouser, Width=0.049inch
J1: "USB_Connector_5P_MICRO_USB_FCI", Current Rating="1.8A per Contact", Insulation Color=Black, Manufacturer="Amphenol FCI", Manufacturer Part Number=10118194-0001LF, Material Flammability Rating="UL94 V-0", Operating Temperature="-30°C ~ 80°C", Supplier Part Number 1=609-4618-1-ND, Voltage - Rated=100VAC, Category="Connectors, Interconnects", ComponentLink1Description=http://portal.fciconnect.com/Comergent//fci/drawing/10118194.pdf, ComponentLink1URL=http://portal.fciconnect.com/Comergent//fci/drawing/10118194.pdf, Connector Type="USB - micro B", Contact Finish=Gold, Features="Solder Retention", Gender=Receptacle, Ingress Protection=-, Mating Cycles=10000, Mounting Feature=Horizontal, Mounting Type="Surface Mount, Right Angle; Through Hole", Number of Contacts=5, Number of Ports=1, Packaging="Cut Tape (CT)", Part Status=Active, Pricing 1="1=0.46, 10=0.437, 25=0.3744, 50=0.318, 100=0.3056, 250=0.27444, 500=0.26196 (USD)", RoHS="RoHS Compliant", Shell/Shielding Material="Steel, Stainless", Shielding=Shielded, Specifications="USB 2.0", Stock 1=267893, Supplier 1=Digi-Key, Termination=Solder
J2 J3 J4 J5 J6 J7 J8 J9 J10 J11 J12 J13 J14 J15 J16 J17 J18 J19 J20 J21 J22 J23 J24 J25 J26: library part CON-1_Pin_Thread, "Header, 1 pin, Conductive Thread"
J28: library part CON-6Pin-100Mil, "Header, 6 pin, .1 pitch", Current Rating=-, Insulation Color=Black, Manufacturer="Amphenol FCI", Manufacturer Part Number=68000-406HLF, Material Flammability Rating="UL94 V-0", Supplier Part Number 1=609-3263-ND, Applications=-, Category="Connectors, Interconnects", ComponentLink1Description=http://portal.fciconnect.com/Comergent//fci/drawing/68000.pdf, ComponentLink1URL=http://portal.fciconnect.com/Comergent//fci/drawing/68000.pdf, Connector Type=Header, Contact Finish - Mating=Tin, Contact Finish - Post=Tin, Contact Finish Thickness - Mating="100µin (2.54µm)", Contact Finish Thickness - Post=-, Contact Length - Mating="0.230\" (5.84mm)", Contact Length - Post="0.095\" (2.41mm)", Contact Material="Phosphor Bronze", Contact Shape=Square, Contact Type="Male Pin", Fastening Type=-, Features=-, Ingress Protection=-, Insulation Height="0.100\" (2.54mm)", Insulation Material=-, Mated Stacking Heights=-, Mounting Type="Through Hole", Number of Positions=6, Number of Positions Loaded=All, Number of Rows=1, Operating Temperature=-, Overall Contact Length="0.425\" (10.80mm)", Packaging=Bulk, Part Status=Active, Pitch - Mating="0.100\" (2.54mm)", Pricing 1="1=0.25, 10=0.233, 100=0.1615, 500=0.13662, 1000=0.11178, 5000=0.09936, 10000=0.09005 (USD)", RoHS="RoHS Compliant", Row Spacing - Mating=-, Shrouding=Unshrouded, Stock 1=11680, Style="Board to Board", Supplier 1=Digi-Key, Termination=Solder, Voltage Rating=-
J30: "CONN HEADER .050\" 10PS DL SMD AU", Color=-, Manufacturer="Sullins Connector Solutions", Supplier Part Number 1=S9013E-05-ND, Category="Connectors, Interconnects", ComponentLink1Description=http://www.sullinscorp.com/catalogs/85_PAGE90-91_.050_MALE_HDR_ST_RA_SMT.pdf, ComponentLink1URL=http://www.sullinscorp.com/catalogs/85_PAGE90-91_.050_MALE_HDR_ST_RA_SMT.pdf, Connector Type="Header, Unshrouded", Contact Finish=Gold, Contact Finish Thickness=Flash, Contact Mating Length="0.118\" (3.00mm)", Contact Type="Male Pin", Fastening Type=-, Features="Board Guide", Manufacturer Part Number=GRPB052VWQP-RC, Mounting Type="Surface Mount", Number of Positions=10, Number of Positions Loaded=All, Number of Rows=2, Packaging=Bulk, Pitch="0.050\" (1.27mm)", Pricing 1="1=1.3, 10=1.083, 25=1.0024, 50=0.9022, 100=0.802, 250=0.70176, 500=0.6416, 1000=0.58145, 2500=0.5213 (USD)", RoHS="RoHS Compliant", Row Spacing="0.050\" (1.27mm)", Stock 1=16500, Supplier 1=Digi-Key, Termination=Solder
Q1 Q2: library part FMMT591CT-ND, "Transistor PNP", Current - Collector (Ic) (Max)=1A, Current - Collector Cutoff (Max)=100nA, DC Current Gain (hFE) (Min) @ Ic, Vce="100 @ 500mA, 5V", Frequency - Transition=150MHz, Manufacturer="Diodes Incorporated", Manufacturer Part Number=FMMT591TA, Operating Temperature="-55°C ~ 150°C (TJ)", Package / Case="TO-236-3, SC-59, SOT-23-3", Power - Max=500mW, Supplier Device Package=SOT-23-3, Voltage - Collector Emitter Breakdown (Max)=60V, Category="Discrete Semiconductor Products", ComponentLink1Description=http://www.diodes.com/_files/datasheets/FMMT591.pdf, ComponentLink1URL=http://www.diodes.com/_files/datasheets/FMMT591.pdf, Mounting Type="Surface Mount", Packaging="Cut Tape (CT)", Part Status=Active, Pricing 1="1=0.45, 10=0.363, 100=0.2472, 500=0.1854, 1000=0.13905 (USD)", RoHS="RoHS Compliant", Stock 1=2485, Supplier 1=Digi-Key, Supplier Part Number 1=FMMT591CT-ND, Transistor Type=PNP, Vce Saturation (Max) @ Ib, Ic="350mV @ 100mA, 1A"
Q3: Case/Package=SOT-23, Continuous Drain Current (ID)=4A, Drain to Source Breakdown Voltage=-12V, Drain to Source Resistance=31mR, Drain to Source Voltage (Vdss)=12V, Gate to Source Voltage (Vgs)=8V, Input Capacitance=1.357nF, Manufacturer=Diodes, Manufacturer Part Number=DMP1045U-7, Max Operating Temperature=150°C, Max Power Dissipation=800mW, Min Operating Temperature=-55°C, Package Quantity=3000, Power Dissipation=1.3W, Supplier Part Number 1=621-DMP1045U-7, ComponentLink1Description=https://datasheet.ciiva.com/11176/dmp1045u-11176581.pdf, ComponentLink1URL=https://datasheet.ciiva.com/11176/dmp1045u-11176581.pdf, ComponentLink2Description=https://datasheet.ciiva.com/17323/dmp1045u-17323644.pdf, ComponentLink2URL=https://datasheet.ciiva.com/17323/dmp1045u-17323644.pdf, ComponentLink3Description=https://datasheet.ciiva.com/18648/dmp1045u-18648300.pdf, ComponentLink3URL=https://datasheet.ciiva.com/18648/dmp1045u-18648300.pdf, Contact Plating=Tin, Element Configuration=Single, Fall Time=106.9ns, Height=1.1mm, Lead Free="Lead Free", Length=3mm, Mount="Surface Mount", Number of Channels=1, Number of Elements=1, Number of Pins=3, Packaging="Tape and Reel", Pricing 1="1=0.43, 10=0.298, 50=0.298, 100=0.137, 1000=0.105, 10000=0.082 (USD)", Radiation Hardening=No, Rds On Max=31mR, REACH SVHC="No SVHC", Rise Time=23.3ns, Stock 1=5719, Supplier 1=Mouser, Turn-Off Delay Time=91.2ns, Turn-On Delay Time=15.7ns, Weight=0.000282oz, Width=1.4mm
R1 R2: library part R-0805(2012), "___ OHM ___ mW 0805(2012) SMD", Manufacturer=Yageo, Manufacturer Part Number=RC0805JR-0727RL, Operating Temperature="-55°C ~ 155°C", Package / Case="0805 (2012 Metric)", Power (Watts)="0.125W, 1/8W", Supplier Device Package=0805, Supplier Part Number 1=311-27ARCT-ND, Temperature Coefficient=±100ppm/°C, Tolerance=±5%, Category=Resistors, ComponentLink1Description=http://www.yageo.com/documents/recent/PYu-RC_Group_51_RoHS_L_7.pdf, ComponentLink1URL=http://www.yageo.com/documents/recent/PYu-RC_Group_51_RoHS_L_7.pdf, Composition="Thick Film", Failure Rate=-, Features="Moisture Resistant", Height - Seated (Max)="0.024\" (0.60mm)", Packaging="Cut Tape (CT)", Part Status=Active, Pricing 1="1=0.1, 10=0.016, 25=0.0116, 50=0.009, 100=0.0066, 250=0.00504, 500=0.00404, 1000=0.00297 (USD)", Resistance (Ohms)=27, RoHS="RoHS Compliant", Size / Dimension="0.079\" L x 0.049\" W (2.00mm x 1.25mm)", Stock 1=89837, Supplier 1=Digi-Key
R3 R4: library part R-0805(2012), "___ OHM ___ mW 0805(2012) SMD", Manufacturer=Yageo, Manufacturer Part Number=RC0805JR-0730RL, Operating Temperature="-55°C ~ 155°C", Package / Case="0805 (2012 Metric)", Power (Watts)="0.125W, 1/8W", Supplier Device Package=0805, Supplier Part Number 1=311-30ARCT-ND, Temperature Coefficient=±100ppm/°C, Tolerance=±5%, Category=Resistors, ComponentLink1Description=http://www.yageo.com/documents/recent/PYu-RC_Group_51_RoHS_L_7.pdf, ComponentLink1URL=http://www.yageo.com/documents/recent/PYu-RC_Group_51_RoHS_L_7.pdf, Composition="Thick Film", Failure Rate=-, Features="Moisture Resistant", Height - Seated (Max)="0.024\" (0.60mm)", Packaging="Cut Tape (CT)", Part Status=Active, Pricing 1="1=0.1, 10=0.016, 25=0.0116, 50=0.009, 100=0.0066, 250=0.00504, 500=0.00404, 1000=0.00297 (USD)", Resistance (Ohms)=30, RoHS="RoHS Compliant", Size / Dimension="0.079\" L x 0.049\" W (2.00mm x 1.25mm)", Stock 1=59788, Supplier 1=Digi-Key
R5 R6: library part R-0805(2012), "___ OHM ___ mW 0805(2012) SMD", Manufacturer=Yageo, Manufacturer Part Number=RC0805JR-071KL, Operating Temperature="-55°C ~ 155°C", Package / Case="0805 (2012 Metric)", Power (Watts)="0.125W, 1/8W", Supplier Device Package=0805, Supplier Part Number 1=311-1.0KARCT-ND, Temperature Coefficient=±100ppm/°C, Tolerance=±5%, Category=Resistors, ComponentLink1Description=http://www.yageo.com/documents/recent/PYu-RC_Group_51_RoHS_L_7.pdf, ComponentLink1URL=http://www.yageo.com/documents/recent/PYu-RC_Group_51_RoHS_L_7.pdf, Composition="Thick Film", Failure Rate=-, Features="Moisture Resistant", Height - Seated (Max)="0.024\" (0.60mm)", Packaging="Cut Tape (CT)", Part Status=Active, Pricing 1="1=0.1, 10=0.016, 25=0.0116, 50=0.009, 100=0.0066, 250=0.00504, 500=0.00404, 1000=0.00297 (USD)", Resistance (Ohms)=1k, RoHS="RoHS Compliant", Size / Dimension="0.079\" L x 0.049\" W (2.00mm x 1.25mm)", Stock 1=1174465, Supplier 1=Digi-Key
R7 R11: library part R-0805(2012), "___ OHM ___ mW 0805(2012) SMD", Case/Package=0805, Case Code (Metric)=2012, Manufacturer=Yageo, Manufacturer Part Number=RC0805FR-0710KL, Max Operating Temperature=155°C, Max Power Dissipation=125mW, Min Operating Temperature=-55°C, Package Quantity=1, Supplier Part Number 1=603-RC0805FR-0710KL, Temperature Coefficient=100ppm/°C, Tolerance=1%, Voltage Rating=150V, Case Code (Imperial)=0805, ComponentLink1Description=https://datasheet.ciiva.com/11808/0900766b8106beab-11808151.pdf, ComponentLink1URL=https://datasheet.ciiva.com/11808/0900766b8106beab-11808151.pdf, ComponentLink2Description=https://datasheet.ciiva.com/12669/rc0805-12669688.pdf, ComponentLink2URL=https://datasheet.ciiva.com/12669/rc0805-12669688.pdf, ComponentLink3Description=https://datasheet.ciiva.com/46447/444164-46447563.pdf, ComponentLink3URL=https://datasheet.ciiva.com/46447/444164-46447563.pdf, ComponentLink4Description=https://datasheet.ciiva.com/2456/pyu-r-int-thick-7-2456972.pdf, ComponentLink4URL=https://datasheet.ciiva.com/2456/pyu-r-int-thick-7-2456972.pdf, ComponentLink5Description=https://datasheet.ciiva.com/2456/pyu-r-int-thick-7-2456973.pdf, ComponentLink5URL=https://datasheet.ciiva.com/2456/pyu-r-int-thick-7-2456973.pdf, ComponentLink6Description=https://datasheet.ciiva.com/2456/pyu-r-int-thick-7-2456974.pdf, ComponentLink6URL=https://datasheet.ciiva.com/2456/pyu-r-int-thick-7-2456974.pdf, ComponentLink7Description=https://datasheet.ciiva.com/16747/rc0805-16747087.pdf, ComponentLink7URL=https://datasheet.ciiva.com/16747/rc0805-16747087.pdf, Composition="Thick Film", Depth=1.25mm, Height=0.024inch, Lead Free="Lead Free", Length=2mm, Military Standard=Not, Number of Terminations=2, Packaging="Tape and Reel", Power Rating=125mW, Pricing 1="1=0.1, 10=0.016, 50=0.016, 100=0.006, 1000=0.004, 10000=0.003 (USD)", REACH SVHC=Unknown, Stock 1=1634514, Supplier 1=Mouser, Termination=SMD/SMT, Width=0.049inch
  R7: Resistance=10k
  R11: Resistance=10KR
R8: library part R-0805(2012), "___ OHM ___ mW 0805(2012) SMD", Resistance=330
R9: library part R-0805(2012), "___ OHM ___ mW 0805(2012) SMD", Case/Package=0805, Case Code (Metric)=2012, Manufacturer="Panasonic ECG", Manufacturer Part Number=ERJ-6ENF9763V, Max Operating Temperature=155°C, Max Power Dissipation=125mW, Min Operating Temperature=-55°C, Package Quantity=1, Supplier Part Number 1=667-ERJ-6ENF9763V, Temperature Coefficient=100ppm/°C, Tolerance=1%, Voltage Rating=150V, Case Code (Imperial)=0805, ComponentLink1Description=https://datasheet.ciiva.com/16776/70260748-16776101.pdf, ComponentLink1URL=https://datasheet.ciiva.com/16776/70260748-16776101.pdf, ComponentLink2Description=https://datasheet.ciiva.com/9179/aoa0000ce2-9179366.pdf, ComponentLink2URL=https://datasheet.ciiva.com/9179/aoa0000ce2-9179366.pdf, ComponentLink3Description=https://datasheet.ciiva.com/16758/70260748-16758678.pdf, ComponentLink3URL=https://datasheet.ciiva.com/16758/70260748-16758678.pdf, ComponentLink4Description=https://datasheet.ciiva.com/46438/1678782-46438408.pdf, ComponentLink4URL=https://datasheet.ciiva.com/46438/1678782-46438408.pdf, ComponentLink5Description=https://datasheet.ciiva.com/22668/1678782-22668460.pdf, ComponentLink5URL=https://datasheet.ciiva.com/22668/1678782-22668460.pdf, Composition="Thick Film", Contact Plating=Tin, Depth=1.25mm, Height=0.6mm, Lead Free="Lead Free", Length=2mm, Mount="Surface Mount", Number of Terminations=2, Packaging="Tape and Reel", Power Rating=125mW, Pricing 1="1=0.1, 10=0.022, 50=0.022, 100=0.009, 1000=0.007, 10000=0.004 (USD)", REACH SVHC=Yes, Resistance=976KR, Stock 1=48708, Supplier 1=Mouser, Termination=SMD/SMT, Voltage Rating (DC)=150V, Width=0.049inch
R10: library part R-0805(2012), "___ OHM ___ mW 0805(2012) SMD", Case/Package=0805, Case Code (Metric)=2012, Manufacturer=Vishay, Manufacturer Part Number=CRCW0805562KFKEA, Max Operating Temperature=155°C, Max Power Dissipation=125mW, Min Operating Temperature=-55°C, Package Quantity=10, Supplier Part Number 1=71-CRCW0805-562K-E3, Temperature Coefficient=100ppm/°C, Tolerance=1%, Voltage Rating=150V, Case Code (Imperial)=0805, ComponentLink1Description=https://datasheet.ciiva.com/22706/1697337-22706277.pdf, ComponentLink1URL=https://datasheet.ciiva.com/22706/1697337-22706277.pdf, ComponentLink2Description=https://datasheet.ciiva.com/2525/dcrcwe3-2525767.pdf, ComponentLink2URL=https://datasheet.ciiva.com/2525/dcrcwe3-2525767.pdf, ComponentLink3Description=https://datasheet.ciiva.com/2525/dcrcwe3-2525768.pdf, ComponentLink3URL=https://datasheet.ciiva.com/2525/dcrcwe3-2525768.pdf, ComponentLink4Description=https://datasheet.ciiva.com/2525/dcrcwe3-2525769.pdf, ComponentLink4URL=https://datasheet.ciiva.com/2525/dcrcwe3-2525769.pdf, ComponentLink5Description=https://datasheet.ciiva.com/8928/dcrcwe3-8928345.pdf, ComponentLink5URL=https://datasheet.ciiva.com/8928/dcrcwe3-8928345.pdf, ComponentLink6Description=https://datasheet.ciiva.com/17160/dcrcwe3-17160041.pdf, ComponentLink6URL=https://datasheet.ciiva.com/17160/dcrcwe3-17160041.pdf, ComponentLink7Description=https://datasheet.ciiva.com/22674/1847332-22674793.pdf, ComponentLink7URL=https://datasheet.ciiva.com/22674/1847332-22674793.pdf, ComponentLink8Description=https://datasheet.ciiva.com/7670/1697337-7670907.pdf, ComponentLink8URL=https://datasheet.ciiva.com/7670/1697337-7670907.pdf, ComponentLink9Description=https://datasheet.ciiva.com/7670/1697337-7670908.pdf, ComponentLink9URL=https://datasheet.ciiva.com/7670/1697337-7670908.pdf, ComponentLink10Description=https://datasheet.ciiva.com/16204/dcrcwe3-16204271.pdf, ComponentLink10URL=https://datasheet.ciiva.com/16204/dcrcwe3-16204271.pdf, Composition="Thick Film", Contact Plating=Tin, Depth=1.25mm, Height=0.02inch, Length=2mm, Military Standard=Not, Number of Pins=2, Number of Terminations=2, Packaging="Tape and Reel", Power Rating=125mW, Pricing 1="1=0.1, 10=0.049, 50=0.049, 100=0.028, 1000=0.019, 10000=0.007 (USD)", Radiation Hardening=No, REACH SVHC=Unknown, Resistance=562KR, Stock 1=9712, Supplier 1=Mouser, Weight=0.000194oz, Width=1.25mm
T1: library part CRYSTAL_8MHz, "Oscillator Crystal 8MHz 10ppm", ESR (Equivalent Series Resistance)="72 Ohm", Frequency Stability=±20ppm, Load Capacitance=18pF, Manufacturer="Abracon LLC", Manufacturer Part Number=ABMM2-8.000MHZ-E2-T, Operating Mode=Fundamental, Operating Temperature="-20°C ~ 70°C", Package / Case="4-SMD, No Lead", Ratings=-, Supplier Part Number 1=535-9628-1-ND, Category="Crystals, Oscillators, Resonators", ComponentLink1Description=http://www.abracon.com/Resonators/ABMM2.pdf, ComponentLink1URL=http://www.abracon.com/Resonators/ABMM2.pdf, Frequency=8MHz, Frequency Tolerance=±20ppm, Height - Seated (Max)="0.047\" (1.20mm)", Mounting Type="Surface Mount", Packaging="Cut Tape (CT)", Part Status=Active, Pricing 1="1=0.82, 10=0.721, 50=0.674, 100=0.5957, 500=0.5643 (USD)", RoHS="RoHS Compliant", Size / Dimension="0.240\" L x 0.142\" W (6.00mm x 3.60mm)", Stock 1=56825, Supplier 1=Digi-Key, Type="MHz Crystal"
U1: "USB to Basic UART Interface Chip, UHCI/OHCI/EHCI Compatible, USB 2.0 Compatible, -40 to +85 degC, 16-Pin QFN, Pb-Free, Tape and Reel", Current - Supply=8mA, Manufacturer="FTDI, Future Technology Devices International Ltd", Operating Temperature="-40°C ~ 85°C", Package / Case="16-WQFN Exposed Pad", Supplier Device Package="16-QFN (4x4)", Supplier Part Number 1=768-1130-1-ND, Voltage - Supply="3.3 V ~ 5 V", Category="Integrated Circuits (ICs)", ComponentLink1Description=http://www.ftdichip.com/Support/Documents/DataSheets/ICs/DS_FT230X.pdf, ComponentLink1URL=http://www.ftdichip.com/Support/Documents/DataSheets/ICs/DS_FT230X.pdf, Function="Bridge, USB to UART", Interface=UART, Manufacturer Part Number=FT230XQ-R, Packaging="Cut Tape (CT)", Part Status=Active, Pricing 1="1=2.3, 25=1.97, 100=1.9, 250=1.71, 500=1.55, 1000=1.53001 (USD)", Protocol=USB, RoHS="RoHS Compliant", Standards="USB 2.0", Stock 1=40408, Supplier 1=Digi-Key
U2 U3: Manufacturer="Analog Devices Inc.", Manufacturer Part Number=AD7147PACPZ-500R7, Operating Temperature="-40°C ~ 85°C", Package / Case="24-WFQFN Exposed Pad, CSP", Supplier Device Package="24-LFCSP-WQ (4x4)", Supplier Part Number 1=AD7147PACPZ-500R7CT-ND, Voltage - Supply="2.6 V ~ 3.6 V", Voltage Supply Source="Single Supply", Category="Integrated Circuits (ICs)", ComponentLink1Description=http://www.analog.com/media/en/technical-documentation/data-sheets/AD7147.pdf, ComponentLink1URL=http://www.analog.com/media/en/technical-documentation/data-sheets/AD7147.pdf, Data Interface=SPI, Mounting Type="Surface Mount", Packaging="Cut Tape (CT)", Part Status=Active, Pricing 1="1=3.6, 10=3.236, 100=2.6512 (USD)", Resolution (Bits)="16 b", RoHS="RoHS Compliant", Sampling Rate (Per Second)=250k, Stock 1=559, Supplier 1=Digi-Key, Type="Capacitance-to-Digital Converter"
U4: Manufacturer="Microchip Technology", Manufacturer Part Number=PIC18F25K80T-I/MM, Operating Temperature="-40°C ~ 85°C (TA)", Package / Case="28-VQFN Exposed Pad", Supplier Device Package="28-QFN-S (6x6)", Supplier Part Number 1=PIC18F25K80T-I/MMCT-ND, Voltage - Supply (Vcc/Vdd)="1.8 V ~ 5.5 V", Category="Integrated Circuits (ICs)", ComponentLink1Description=http://www.microchip.com/mymicrochip/filehandler.aspx?ddocname=en552714, ComponentLink1URL=http://www.microchip.com/mymicrochip/filehandler.aspx?ddocname=en552714, Connectivity="ECAN, I²C, LIN, SPI, UART/USART", Core Processor=PIC, Core Size=8-Bit, Data Converters="A/D 8x12b", EEPROM Size="1K x 8", Number of I/O=24, Oscillator Type=Internal, Packaging="Cut Tape (CT)", Part Status=Active, Peripherals="Brown-out Detect/Reset, LVD, POR, PWM, WDT", Pricing 1="1=2.86, 25=2.6264, 100=2.3793 (USD)", Program Memory Size="32KB (16K x 16)", Program Memory Type=FLASH, RAM Size="3.6K x 8", RoHS="RoHS Compliant", Speed=64MHz, Stock 1=1981, Supplier 1=Digi-Key
U5: Case/Package=SOT-89, Dropout Voltage=1.7V, Manufacturer=STMicroelectronics, Max Input Voltage=30V, Max Operating Temperature=125°C, Max Output Current=100mA, Min Input Voltage=5.3V, Min Operating Temperature=0°C, Min Output Voltage=3.3V, Output Voltage Accuracy=4%, Package Quantity=2500, Power Supply Rejection Ratio (PSRR)=49dB, Quiescent Current=6mA, Supplier Part Number 1=511-L78L33ACU, Accuracy=4%, ComponentLink7Description=https://datasheet.ciiva.com/41439/001184652-da-01-en-ic-reg-ldo-3-3v-l78l33acutr-sot-89-3-stm-41439755.pdf, ComponentLink7URL=https://datasheet.ciiva.com/41439/001184652-da-01-en-ic-reg-ldo-3-3v-l78l33acutr-sot-89-3-stm-41439755.pdf, Height=1.6mm, Lead Free="Lead Free", Length=4.6mm, Manufacturer Part Number=L78L33ACUTR, Mount="Surface Mount", Nominal Output Voltage=3.3V, Number of Outputs=1, Number of Pins=3, Number of Regulators=1, Output Current=100mA, Output Voltage=3.3V, Packaging="Tape and Reel", Polarity=Positive, Pricing 1="1=0.42, 10=0.319, 50=0.319, 100=0.173, 1000=0.13, 10000=0.105 (USD)", Radiation Hardening=No, REACH SVHC="No SVHC", Stock 1=36473, Supplier 1=Mouser, Weight=0.01lb, Width=2.6mm
U6: "CLASS 2 BLTOOTH 4.0 MODULE", Current - Receiving=25mA, Current - Transmitting=36mA, Frequency=2.4GHz, Manufacturer="Silicon Labs", Operating Temperature="-40°C ~ 85°C", Package / Case=Module, Power - Output=3dBm, Supplier Part Number 1=1446-1017-1-ND, Voltage - Supply="2 V ~ 3.6 V", Antenna Type="Integrated, Chip", Category="RF/IF and RFID", ComponentLink1Description=http://media.digikey.com/pdf/Data%20Sheets/BlueGiga%20PDFs/BLE112.pdf, ComponentLink1URL=http://media.digikey.com/pdf/Data%20Sheets/BlueGiga%20PDFs/BLE112.pdf, Data Rate=2Mbps, Manufacturer Part Number=BLE112-A-V1, Memory Size="256kB Flash, 8kB SRAM", Modulation=-, Mounting Type="Surface Mount", Packaging="Cut Tape (CT)", Pricing 1="1=15.66, 25=14.2956, 100=12.9341 (USD)", Protocol="Bluetooth v4.0 Low Energy", RF Family/Standard=Bluetooth, RoHS="RoHS Compliant", Sensitivity=-85dBm, Serial Interfaces="SPI, UART", Stock 1=8978, Supplier 1=Digi-Key
U7: "3D accelerometer and 3D gyroscope", Manufacturer=STMicroelectronics, Manufacturer Part Number=LSM6DS3HTR, Operating Temperature="-40°C ~ 85°C (TA)", Supplier Part Number 1=497-16367-1-ND, Category="Sensors, Transducers", ComponentLink1Description=http://www.st.com/content/ccc/resource/technical/document/datasheet/group0/38/96/79/af/ab/62/42/c3/DM00229854/files/DM00229854.pdf/jcr:content/translations/en.DM00229854.pdf, ComponentLink1URL=http://www.st.com/content/ccc/resource/technical/document/datasheet/group0/38/96/79/af/ab/62/42/c3/DM00229854/files/DM00229854.pdf/jcr:content/translations/en.DM00229854.pdf, Output Type="I²C, SPI", Part Status=Active, Pricing 1="1=3.98, 10=3.572, 100=2.9264 (USD)", RoHS="RoHS Compliant", Sensor Type="Accelerometer, Gyroscope, Temperature, 6 Axis", Stock 1=34853, Supplier 1=Digi-Key
U8: library part CMP-0139-00285-1, "Start-up Synchronous Boost Regulator with True Output Disconnect or Input / Output Bypass Option, 350 mA, Input Voltage 0.65 to 5.5 V, Output Voltage 2.0 to 5.5 V, -40 to 85 degC, 6-pin SOT-23 (CHY6), Tape and Reel", Case/Package=SOT-23, Frequency=500KHz, Manufacturer=Microchip, Max Input Voltage=5.5V, Max Operating Temperature=85°C, Max Output Current=350mA, Min Input Voltage=650mV, Min Operating Temperature=-40°C, Min Output Voltage=2V, Package Quantity=3000, Supplier Part Number 1=579-MCP1640BT-I/CHY, ComponentLink1Description=https://datasheet.ciiva.com/17368/22234b-17368709.pdf, ComponentLink1URL=https://datasheet.ciiva.com/17368/22234b-17368709.pdf, ComponentLink2Description=https://datasheet.ciiva.com/7994/1669480-7994598.pdf, ComponentLink2URL=https://datasheet.ciiva.com/7994/1669480-7994598.pdf, ComponentLink3Description=https://datasheet.ciiva.com/14150/mcp1640-eng-datasheet-14150779.pdf, ComponentLink3URL=https://datasheet.ciiva.com/14150/mcp1640-eng-datasheet-14150779.pdf, ComponentLink4Description=https://datasheet.ciiva.com/22711/1669480-22711102.pdf, ComponentLink4URL=https://datasheet.ciiva.com/22711/1669480-22711102.pdf, ComponentLink5Description=https://datasheet.ciiva.com/29305/651405-da-01-en-ic-reg-mcp1640bt-i-chy-sot-23-6-mcp-29305435.pdf, ComponentLink5URL=https://datasheet.ciiva.com/29305/651405-da-01-en-ic-reg-mcp1640bt-i-chy-sot-23-6-mcp-29305435.pdf, Contact Plating=Tin, Efficiency=96%, Height=1.3mm, Lead Free="Lead Free", Length=3.1mm, Manufacturer Part Number=MCP1640BT-I/CHY, Max Output Voltage=5.5V, Max Supply Voltage=5.5V, Min Supply Voltage=650mV, Number of Outputs=1, Number of Pins=6, Output Current=350mA, Output Voltage=5.5V, Packaging="Tape and Reel", Pricing 1="1=0.62, 10=0.57, 50=0.48, 100=0.44, 1000=0.44, 10000=0.44 (USD)", Radiation Hardening=No, REACH SVHC="No SVHC", Stock 1=12237, Supplier 1=Mouser, Switching Frequency=500KHz, Width=1.8mm

## Via types
v1: diameter 30, hole 15, Top Layer to Bottom Layer, 58 vias